# Altium PCB EB2_Cyclone_1_03.PcbDoc (part 1 of 4)
Units mm, origin at the board's own origin, x right, y up, seen from the top; angles counter-clockwise.
Board outline 165.1 x 115.01 mm, 6 copper layers (Top Layer, MidLayer1, VCC Plane, GND Plane, MidLayer2, Bottom Layer); 336 components, 379 nets, 1581 pads, 731 vias.
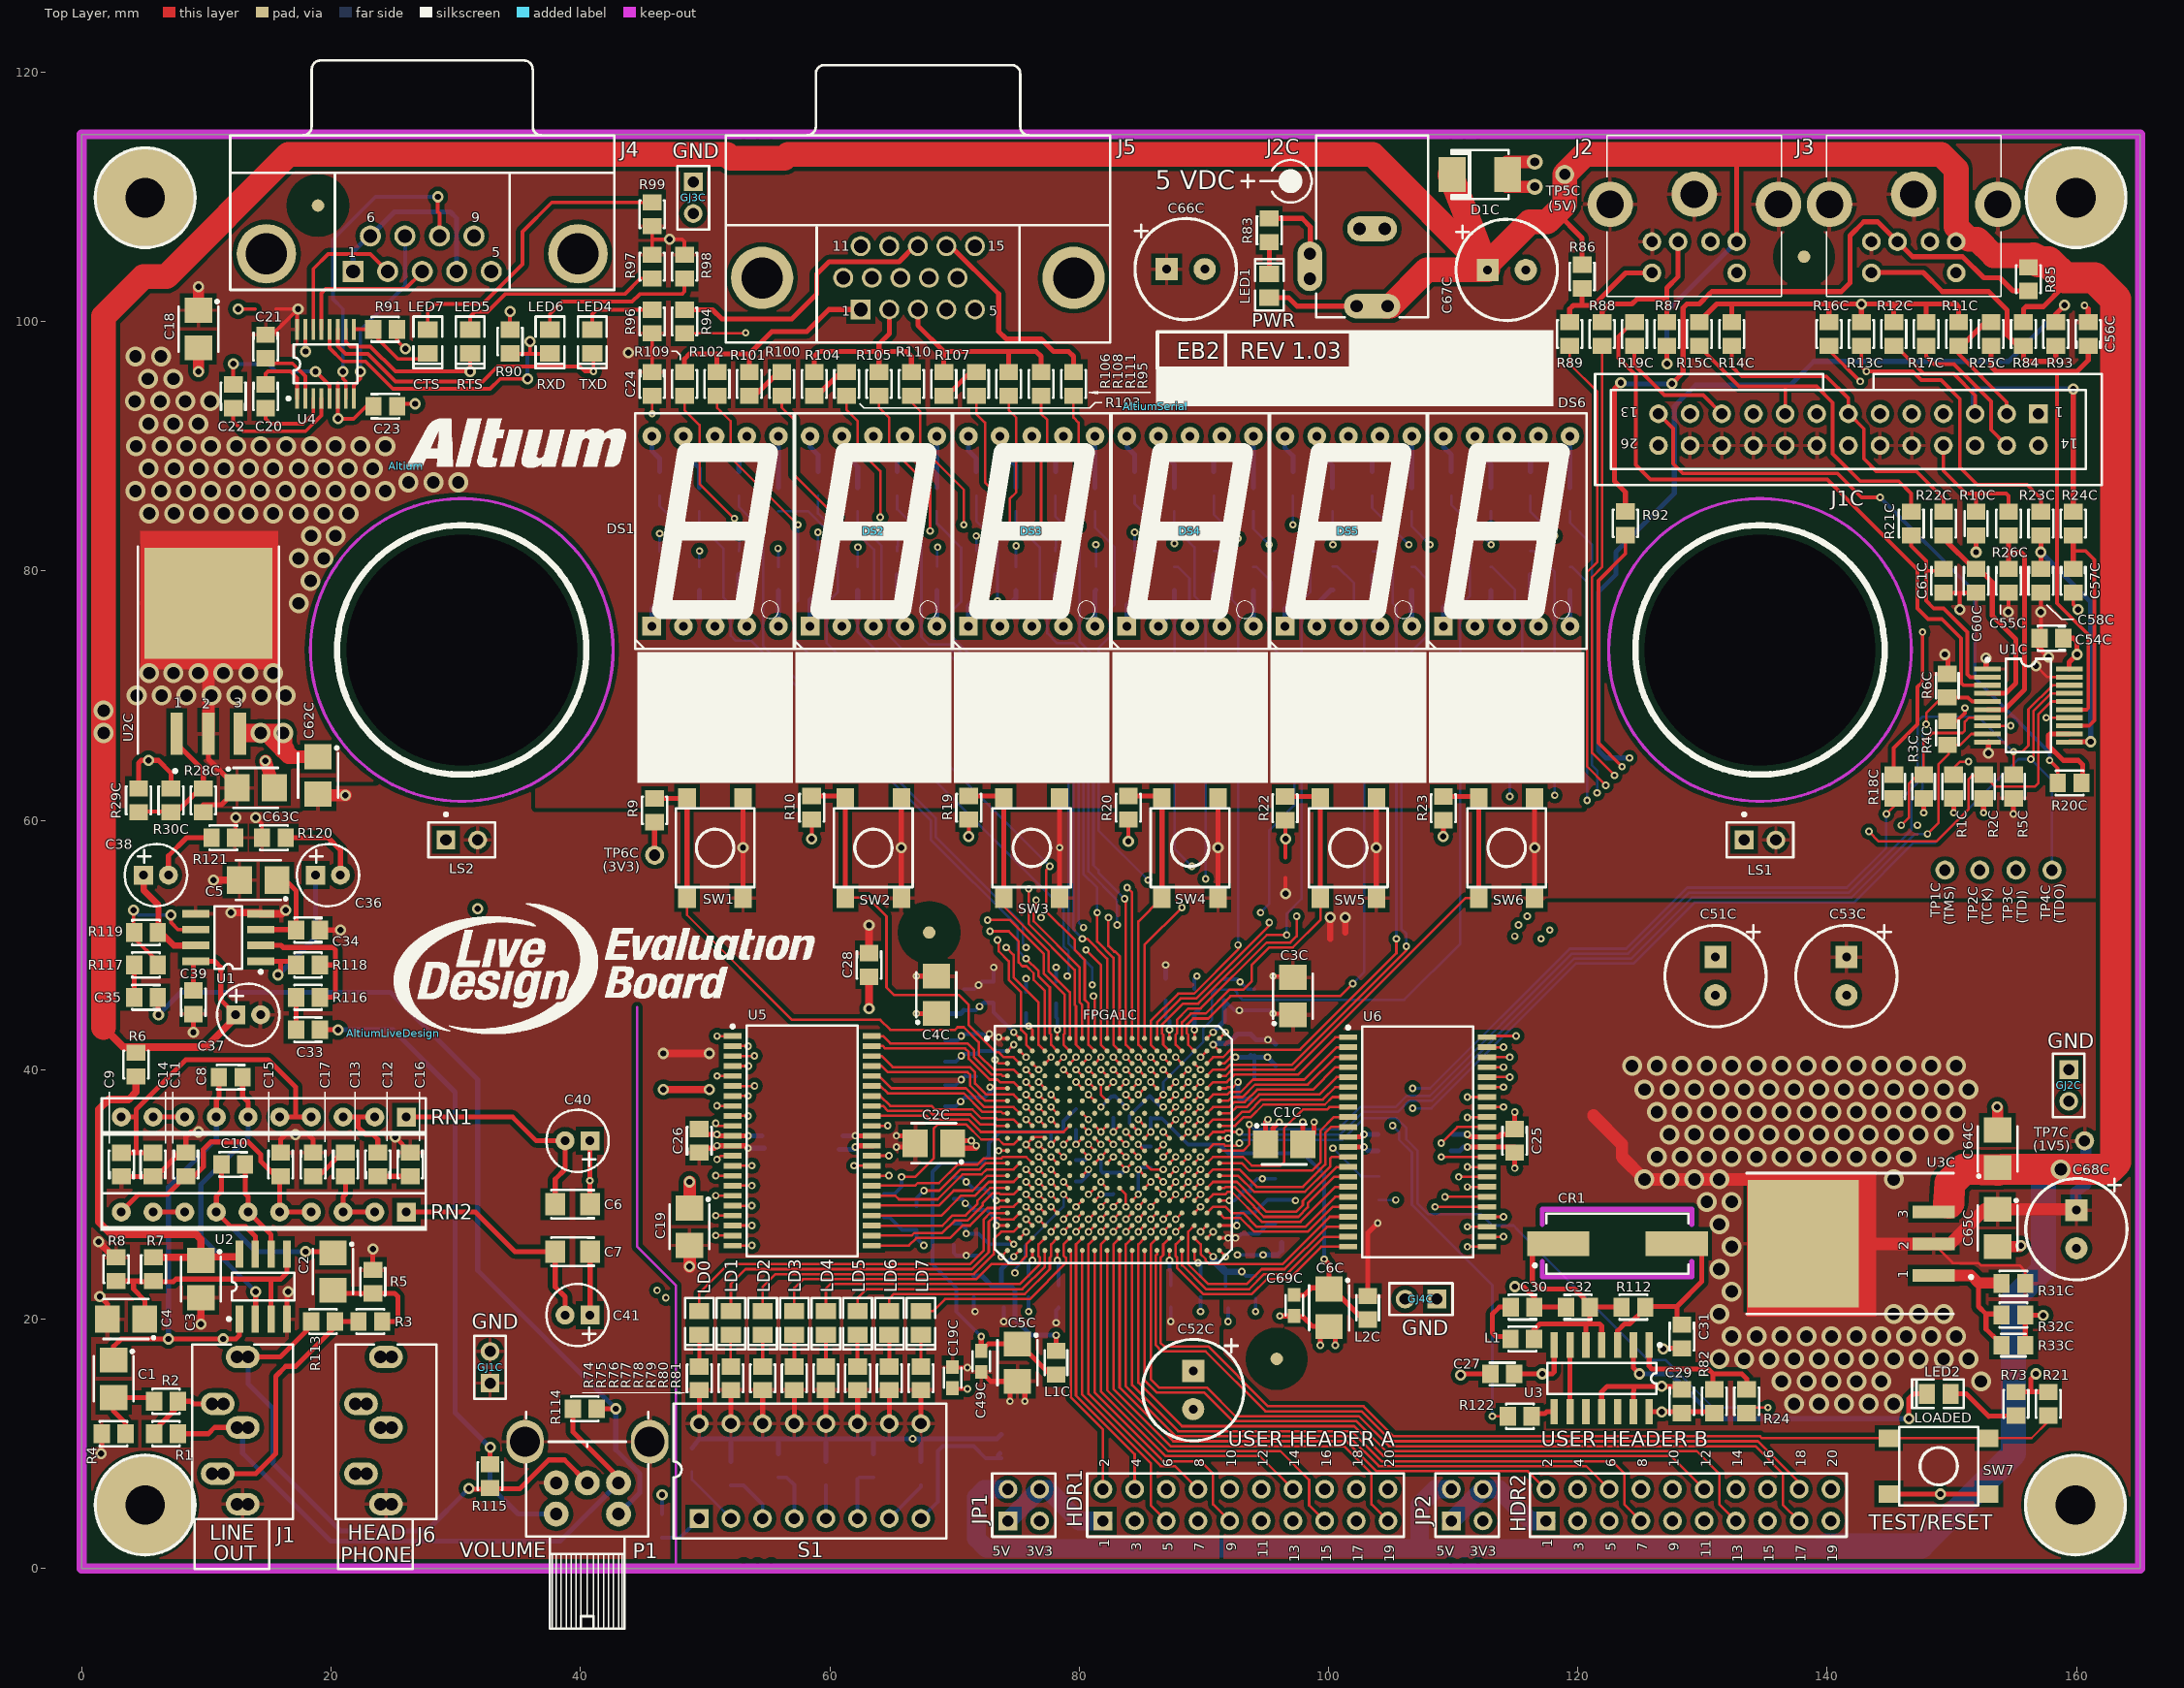
[diagram p0: Top Layer view]
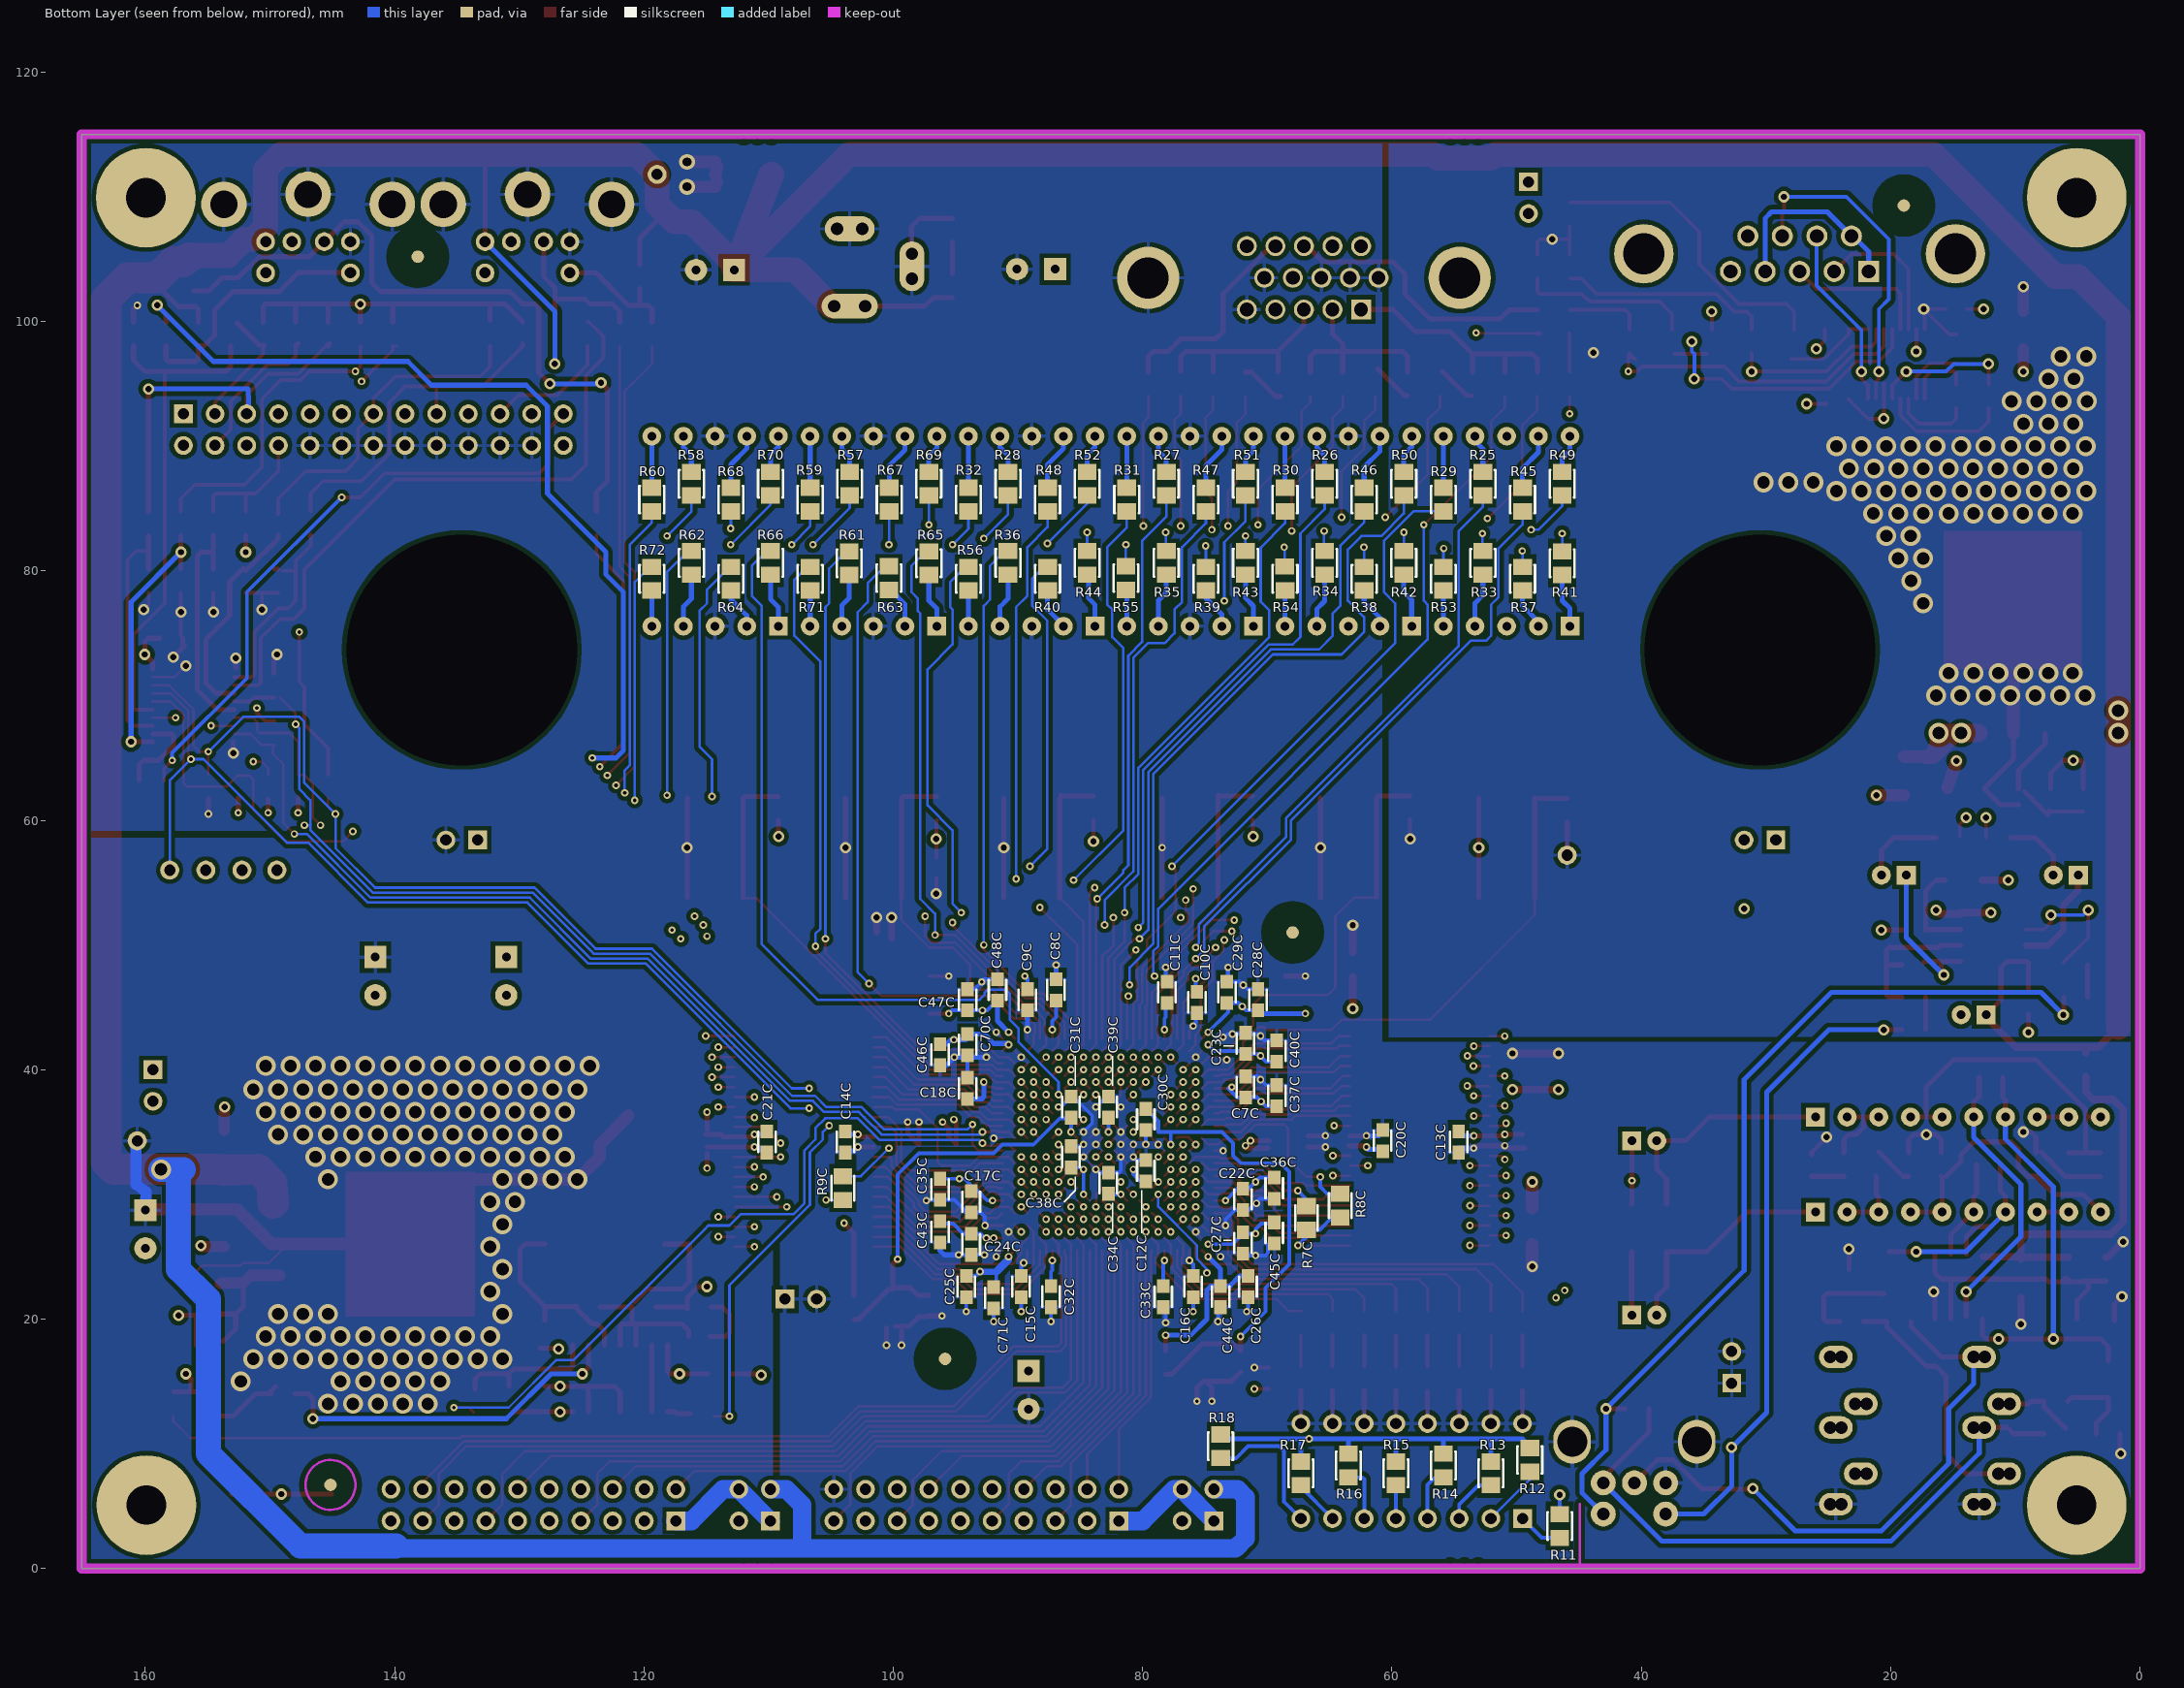
[diagram p1: Bottom Layer view, seen from below]
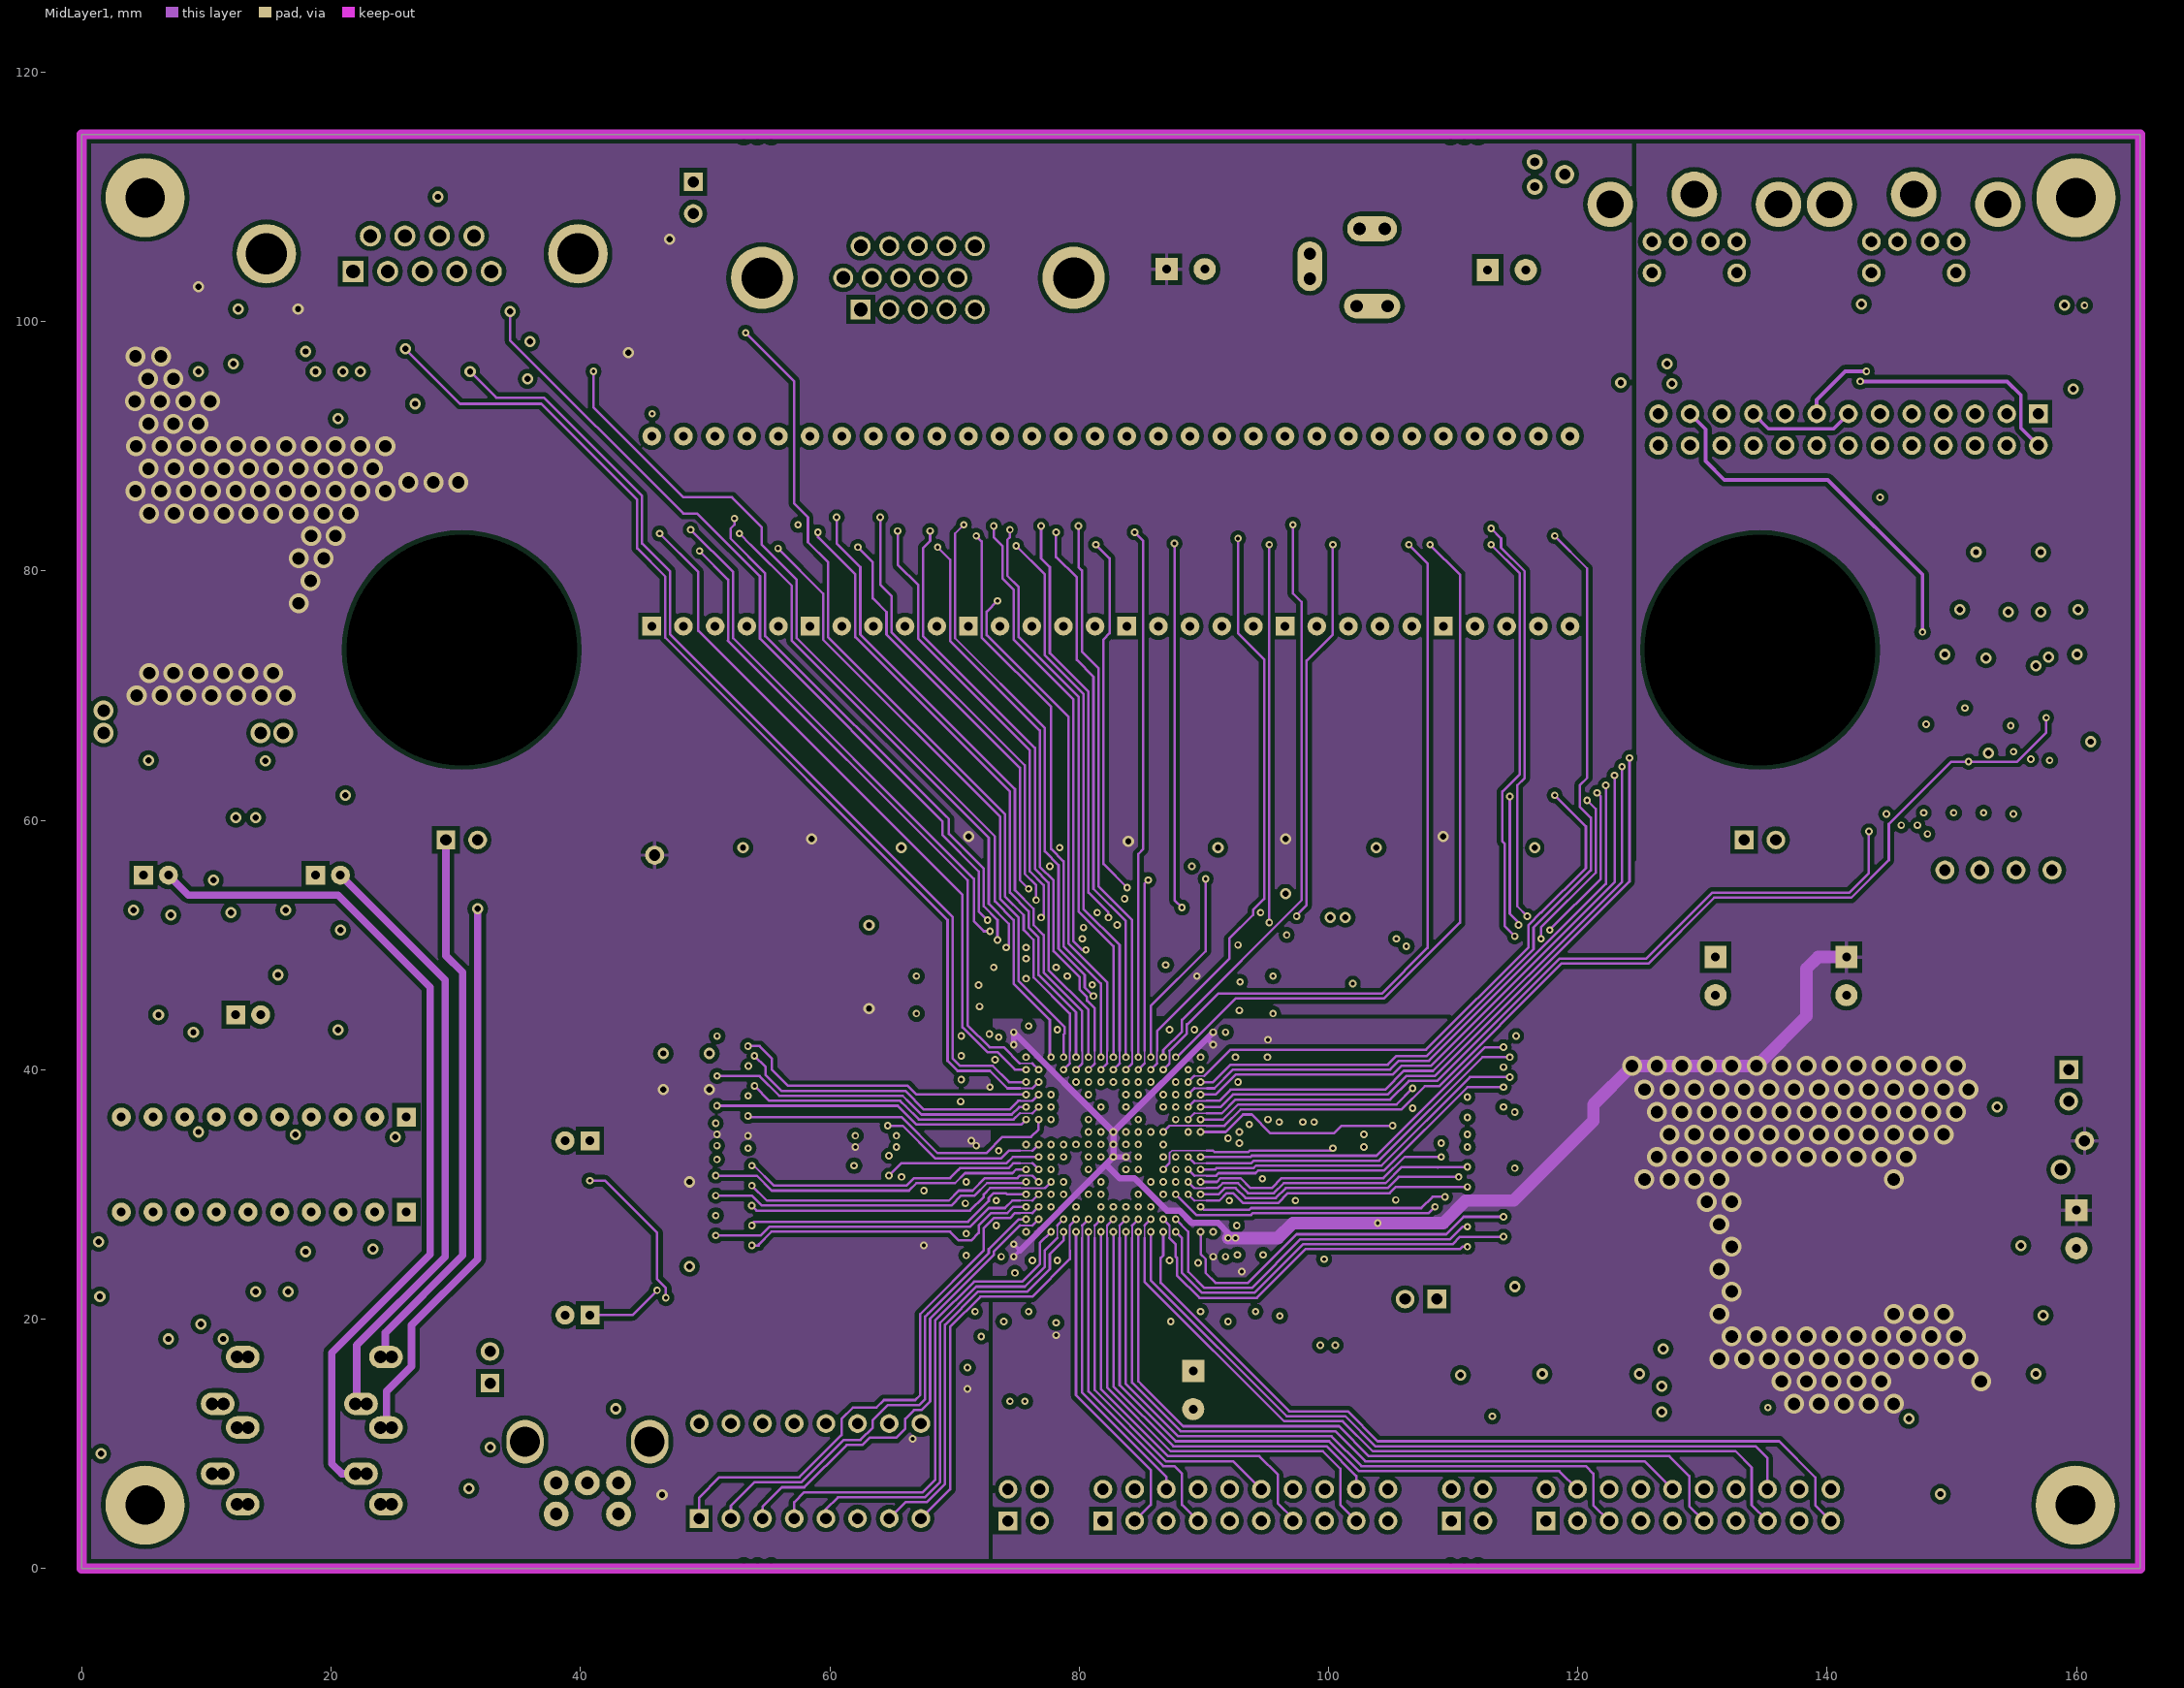
[diagram p2: MidLayer1]
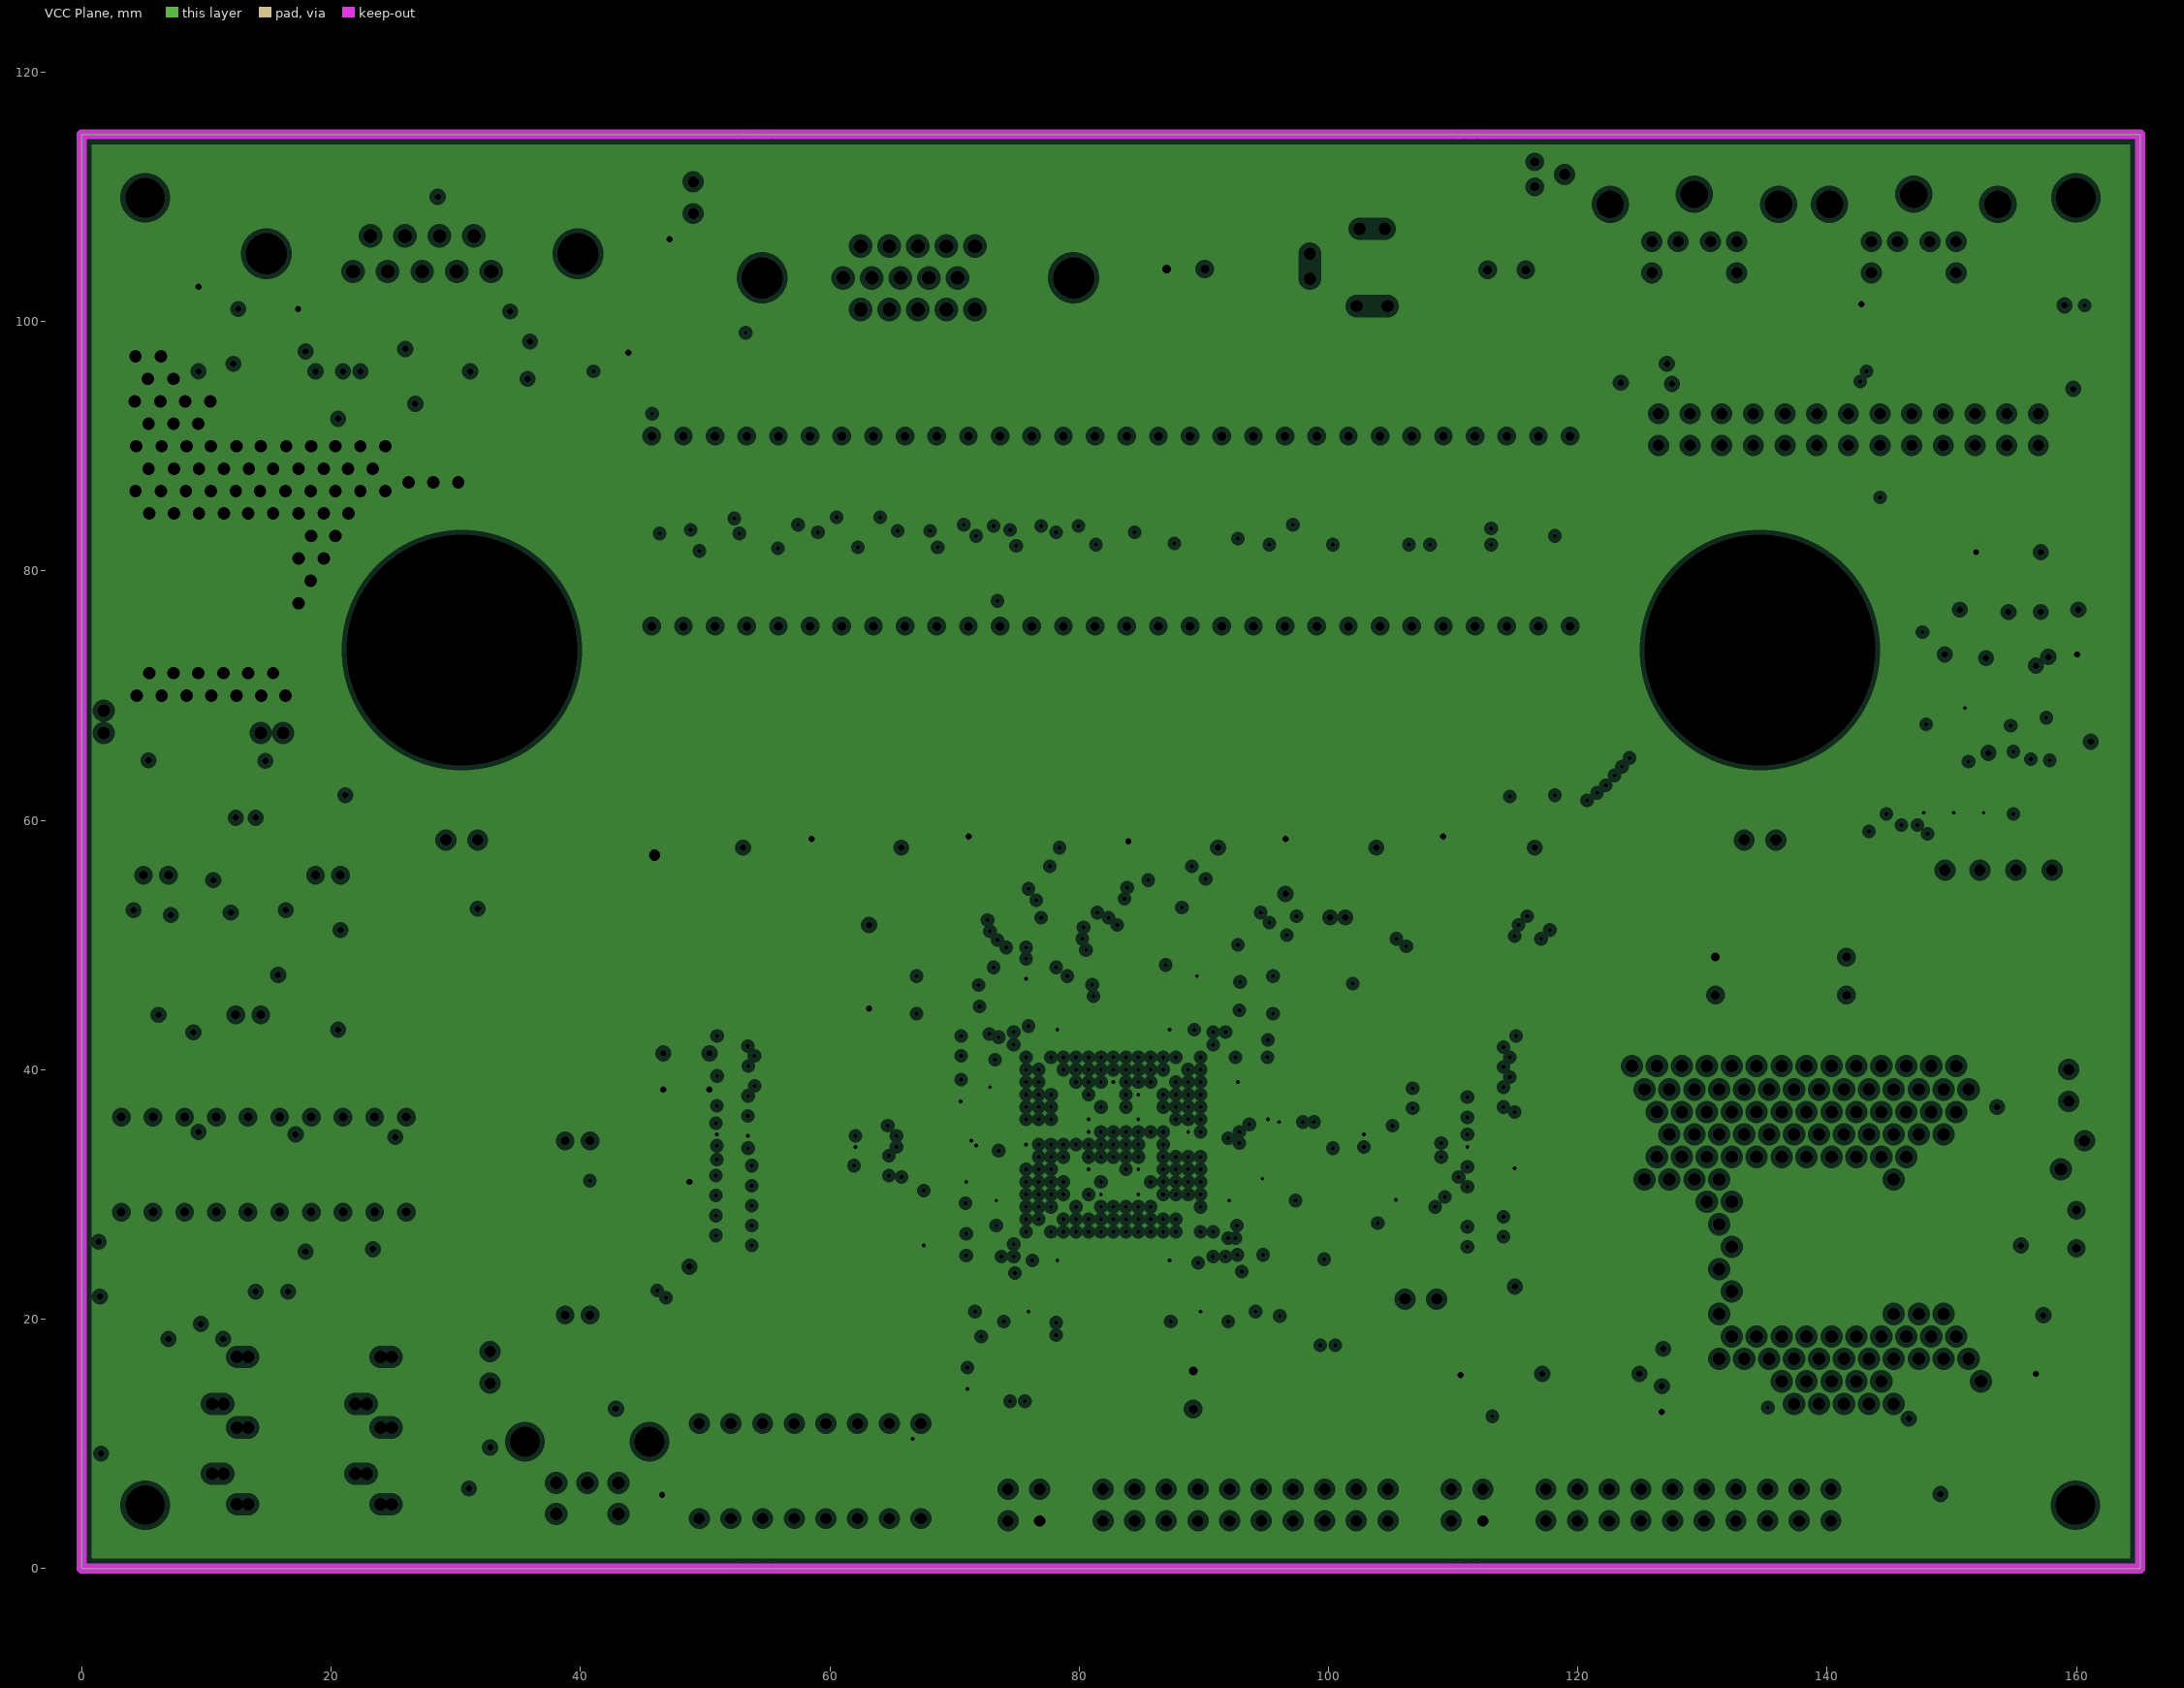
[diagram p3: VCC Plane, clearances drawn from the general rule]
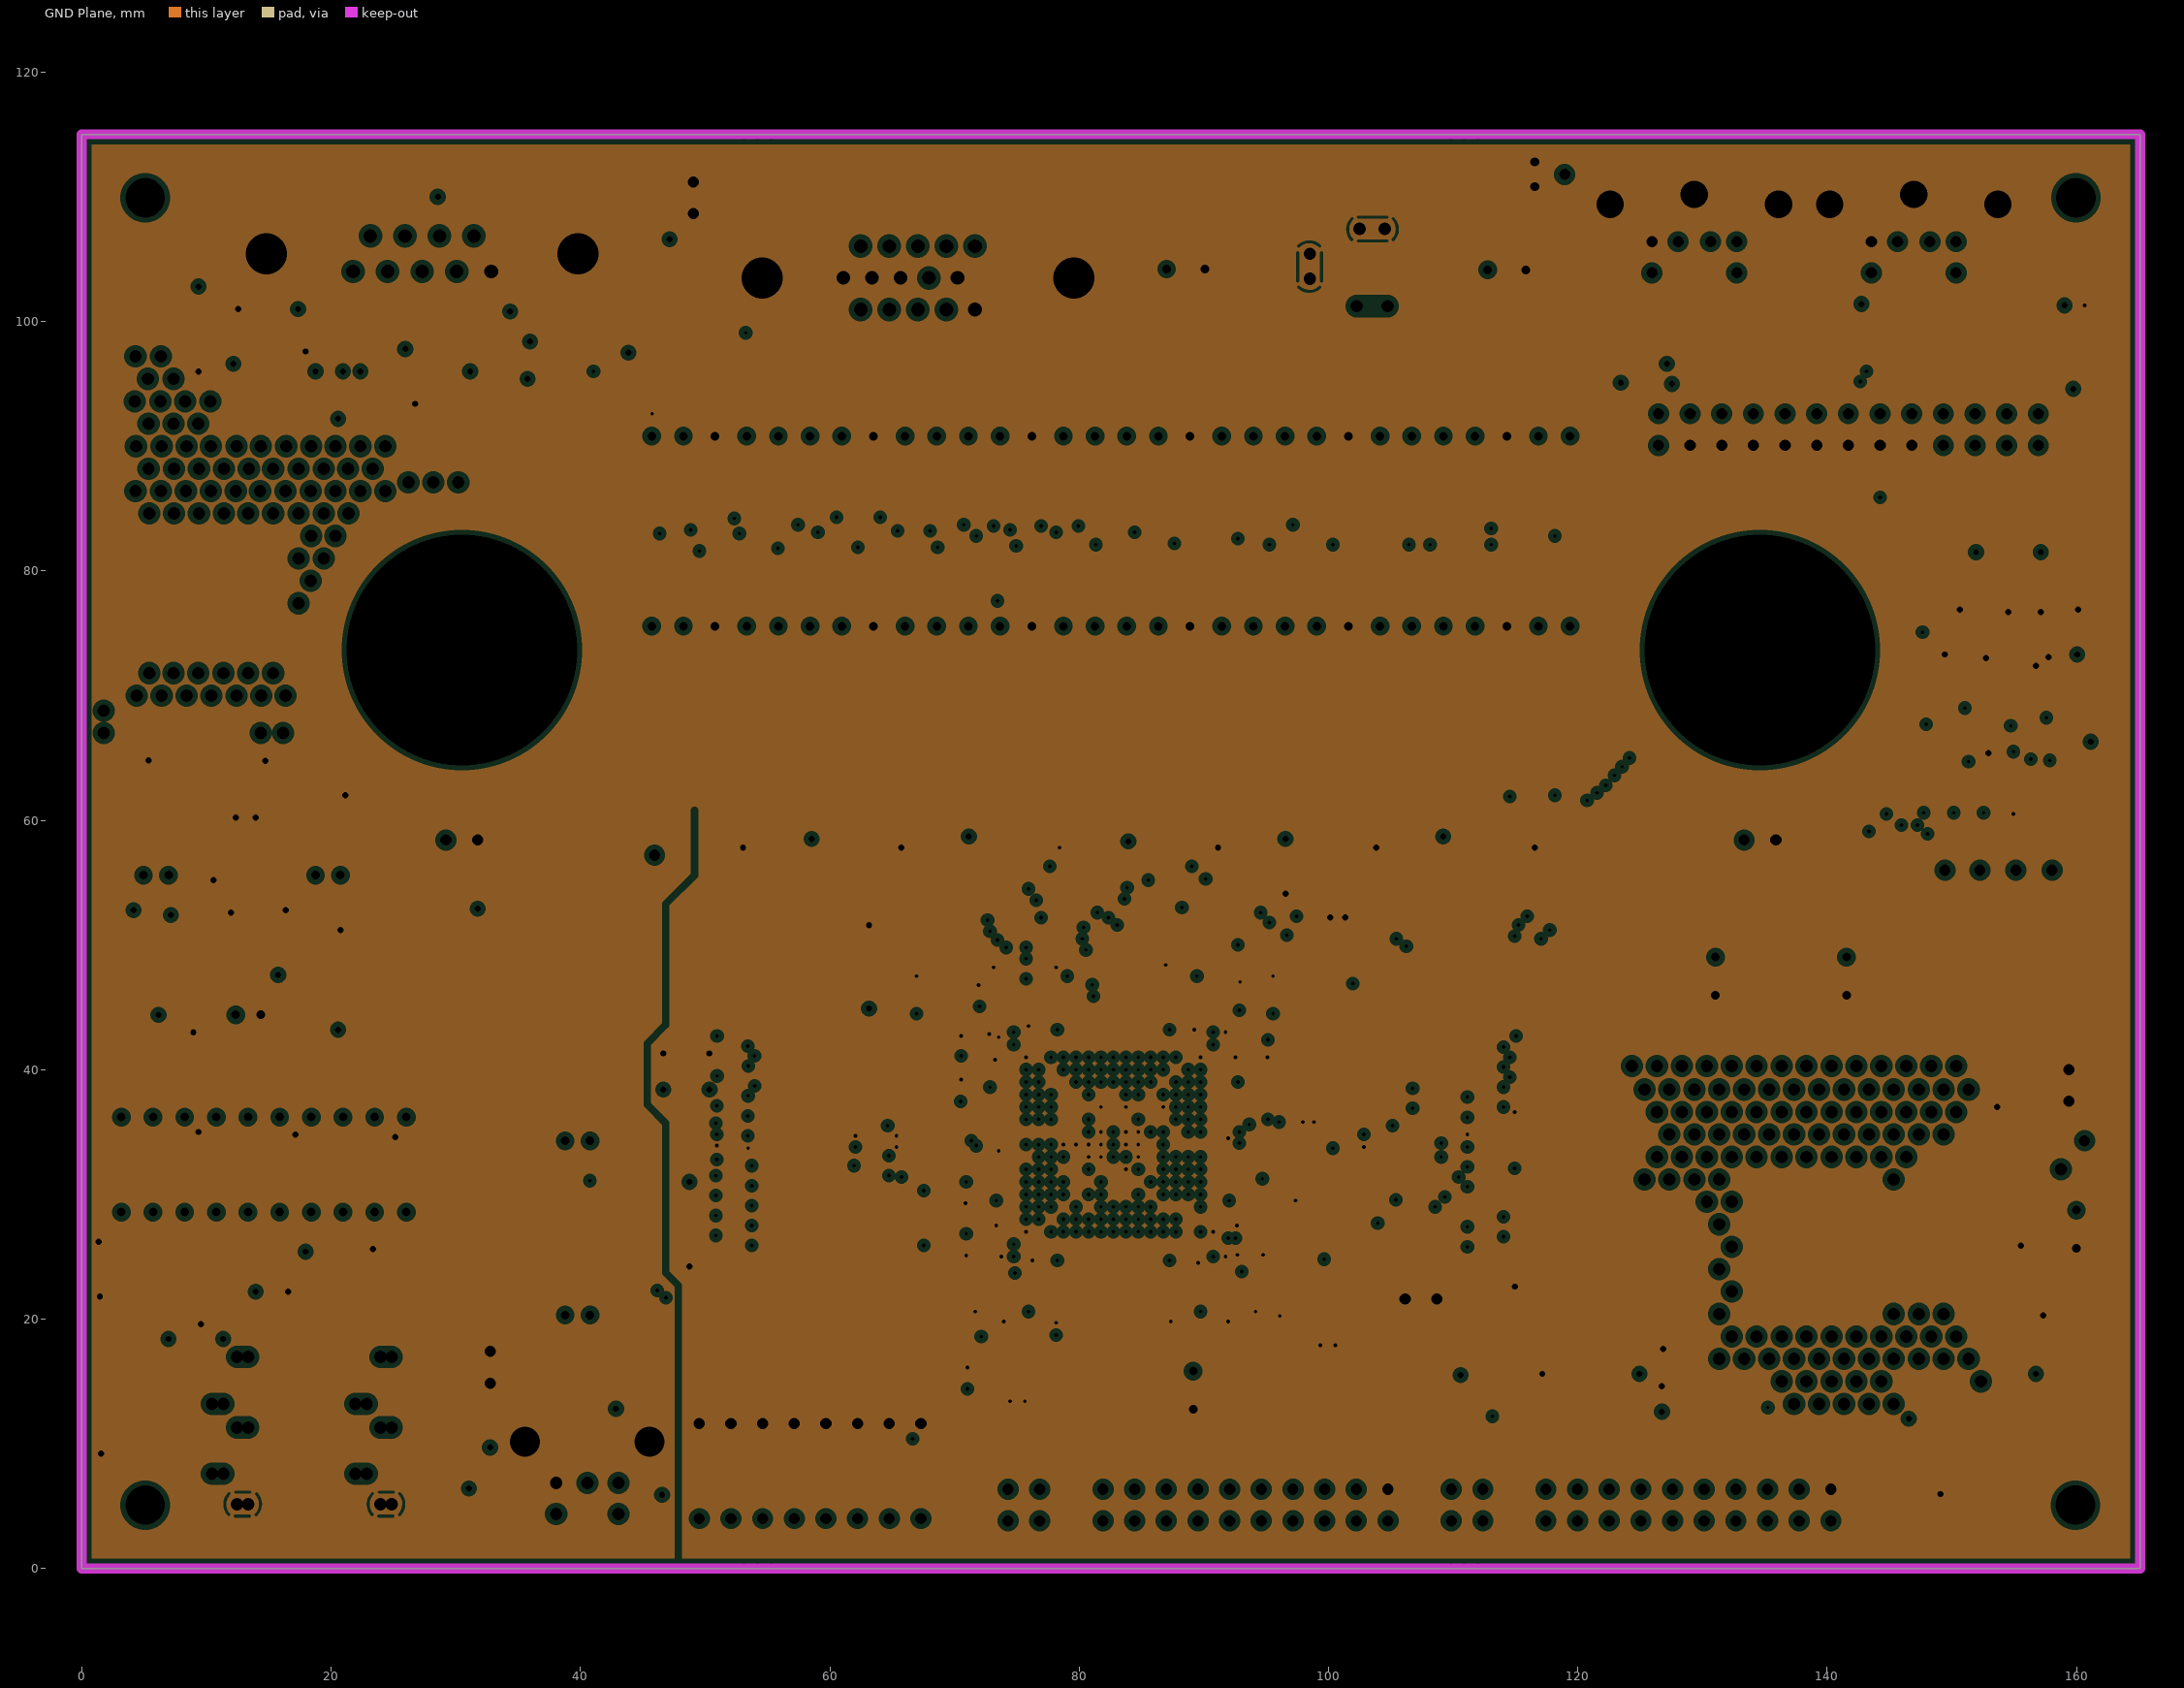
[diagram p4: GND Plane, clearances drawn from the general rule]
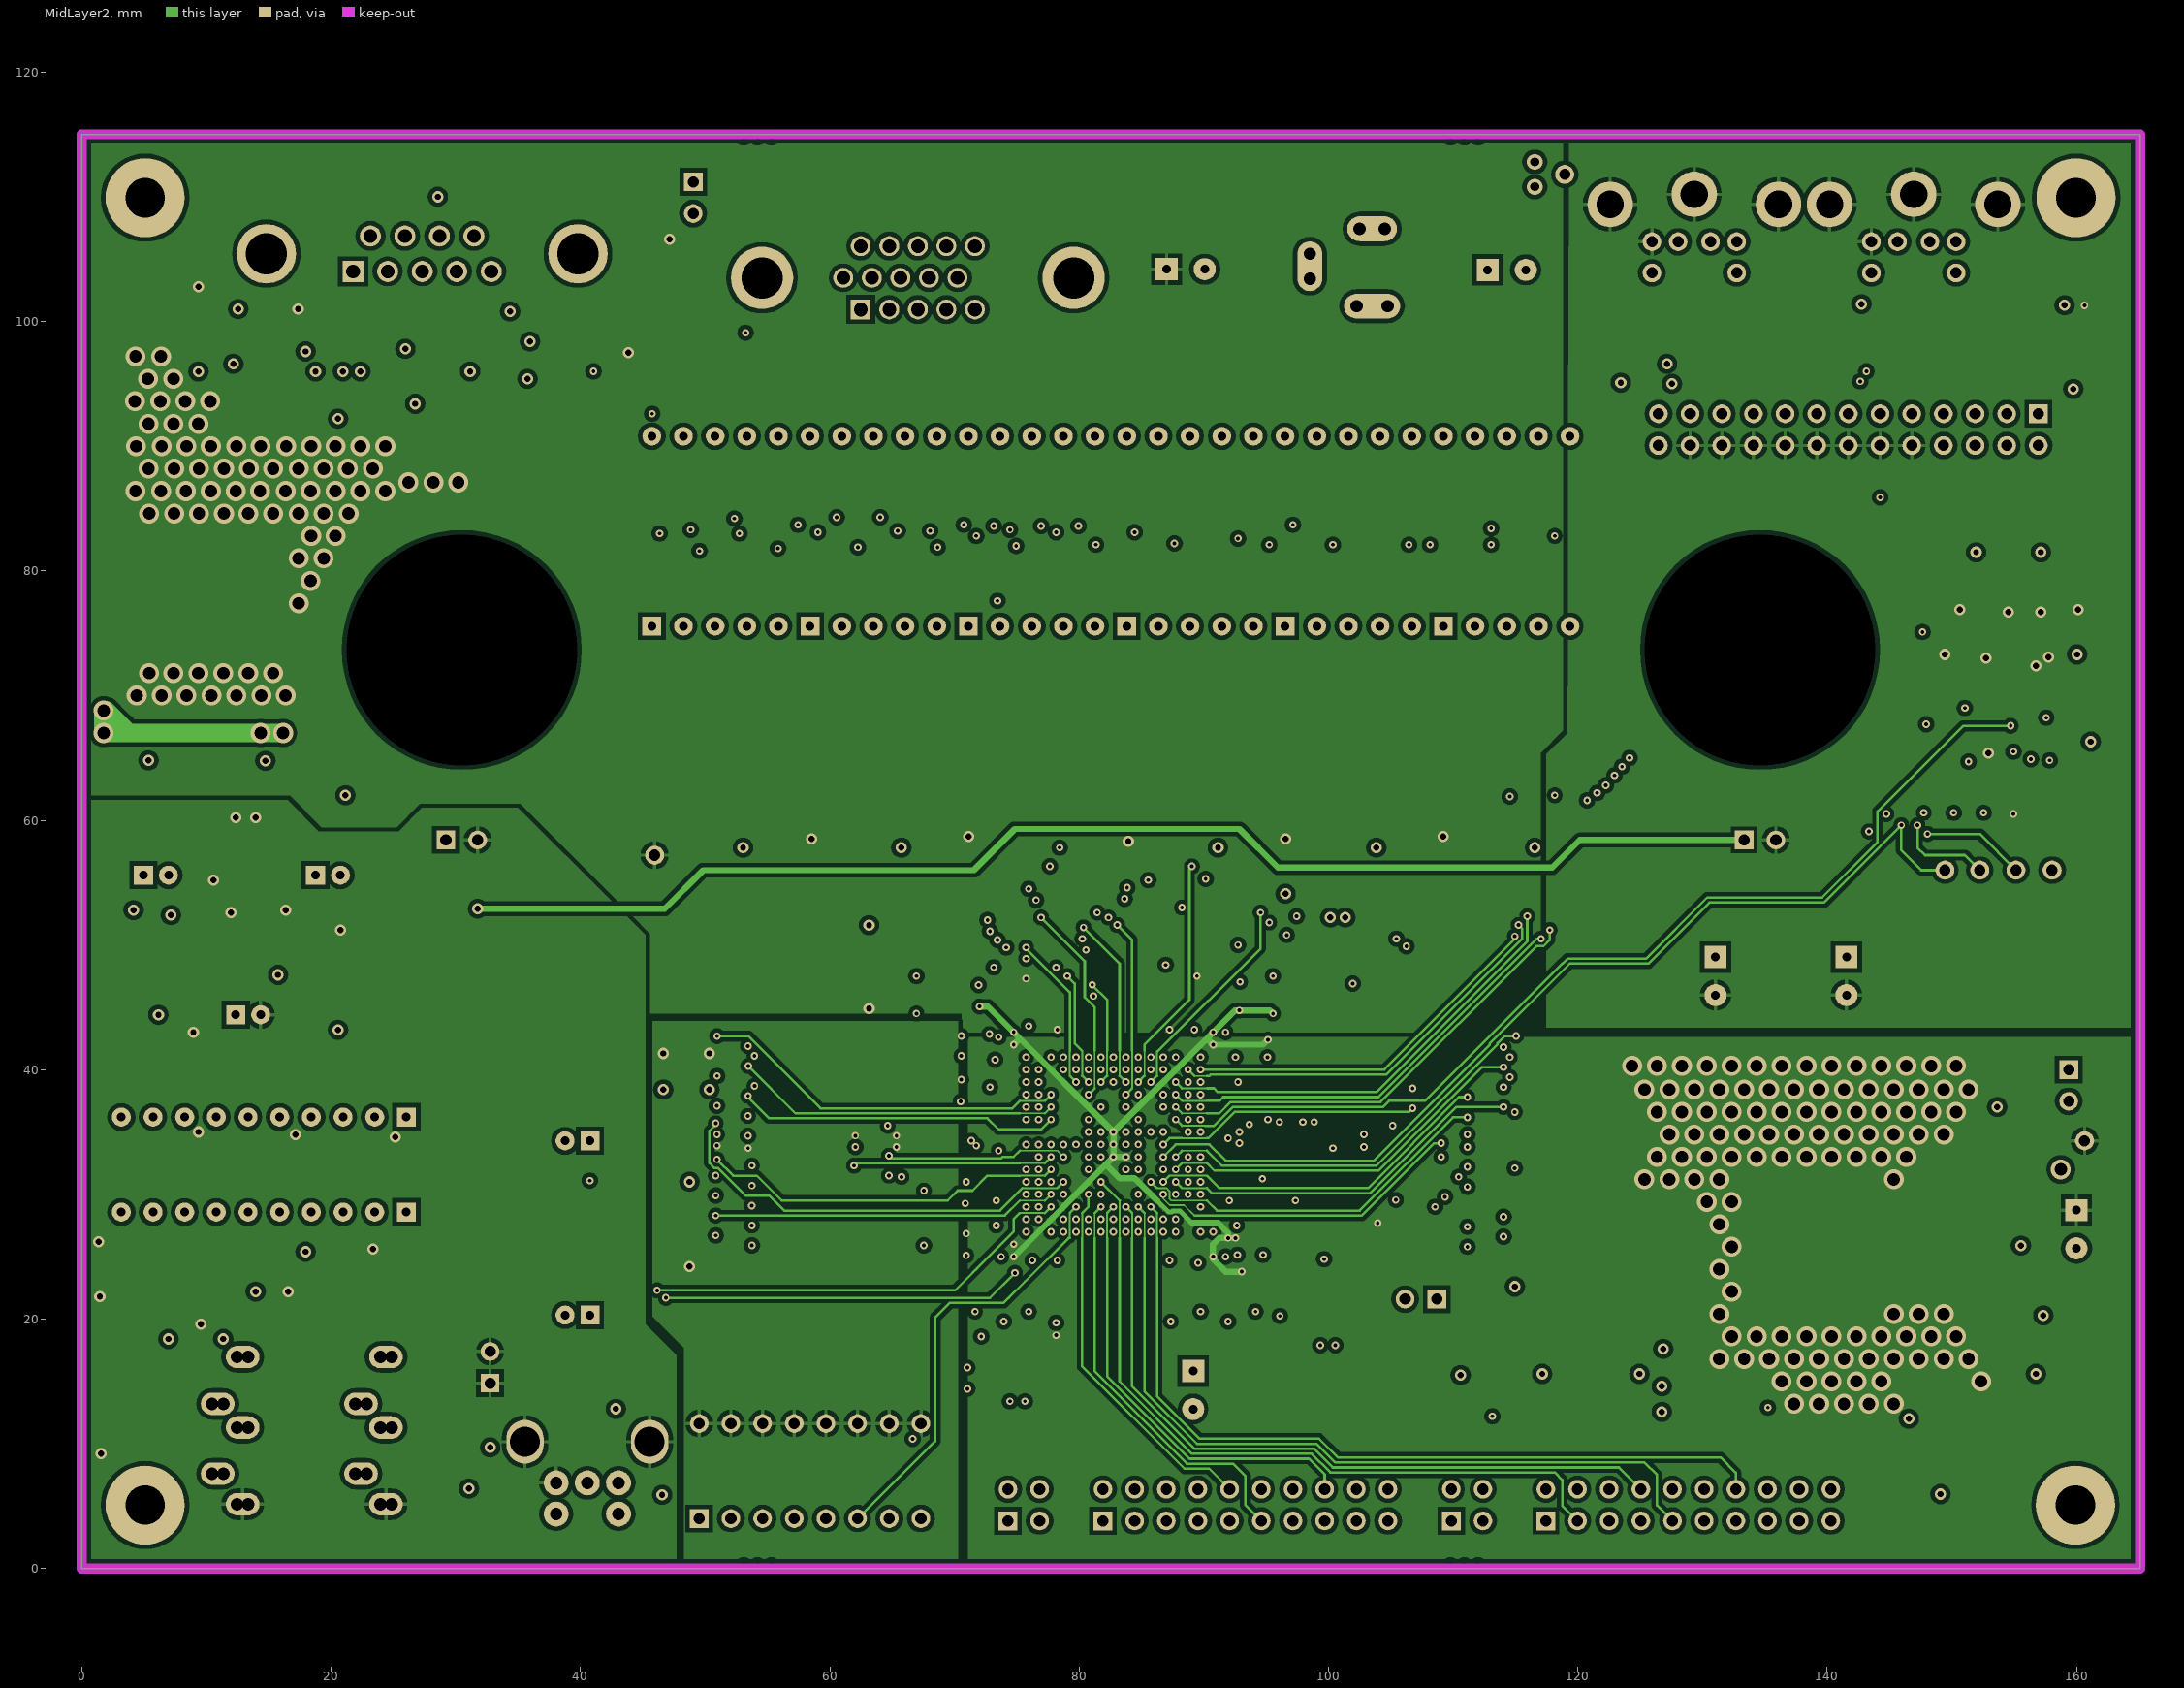
[diagram p5: MidLayer2]

## Layer stack, top to bottom
Top Layer: signal copper 0.0356
Dielectric: core 0.32, FR-4, Dk 4.8
MidLayer1: signal copper 0.0356
Dielectric: prepreg 0.32, FR-4, Dk 4.8
VCC Plane: plane copper 0.0356, net VCC
Dielectric: core 0.32, FR-4, Dk 4.8
GND Plane: plane copper 0.0356, net GND
Dielectric: prepreg 0.32, FR-4, Dk 4.8
MidLayer2: signal copper 0.0356
Dielectric: core 0.32, FR-4, Dk 4.8
Bottom Layer: signal copper 0.0356

## Board outline
0,0 165.1,0 165.1,115.011 0,115.011

## Design rules (kind name [scope] priority, off if disabled: settings)
Clearance Clearance_Breakout_Pads [InPolygon vs IsPad && Name = 'Free-MB'] p1: gap=0.5
Clearance "Fiducial Pad Clearance" [InPadClass('Fiducial Pads')] p2: gap=2
Clearance "Speaker Pad Clearance" [InPadClass('Speaker Cutouts')] p3: gap=3
Clearance Clearance_Polygons [InPolygon] p4: gap=0.35
Clearance "InnerLayer Track-Via Clearance" [OnMid And IsTrack vs IsVia] p5: gap=0.127
Clearance Clearance_SSO-G20/P.65 [HasFootprint('SSO-G20/P.65') vs HasFootprint('SSO-G20/P.65')] p6: gap=0.229
Clearance "Via-Via Clearance" [IsVia vs IsVia] p7: gap=0.3
Clearance "Pad-Pad Clearance Same Net" [IsPad And Not (HasFootprint('ST-3150-5N') Or HasFootPrint('KLD-0202')) vs IsPad] p8: gap=0.254
Clearance "Via-Pad Clearance" [IsVia vs IsPad] p9: gap=0.2
Clearance "General Clearance" [All] p10: gap=0.2
ComponentClearance "7 Segment Display Clearance" [HasFootprint('SA/SC56') vs HasFootprint('SA/SC56')] p1: gap=0 collisioncheckmode=3 verticalgap=0.254 showdistances=FALSE
ComponentClearance "SMD LED Clearance" [HasFootprint('SMD _LED') vs HasFootprint('SMD _LED')] p2: gap=0 collisioncheckmode=3 verticalgap=0.254 showdistances=FALSE
ComponentClearance "General ComponentClearance" [All] p3: gap=0.3 collisioncheckmode=3 verticalgap=0.254 showdistances=FALSE
FabricationTestPointUsage TestPointUsage [All] p1 off: valid=0 allowmultiple=FALSE
FabricationTestpoint Testpoint [All] p1 off: side=3 testpointundercomponent=TRUE minsize=1.016 maxsize=2.54 preferedsize=1.524 minholesize=0 maxholesize=1.016 preferedholesize=0.813 testpointgrid=0.025 allowsidetop=TRUE allowsidebottom=TRUE usegrid=TRUE gridtolerance=0
HoleSize HoleSize_Speaker_Cutouts [(InPadClass('Speaker Cutouts'))] p1: absolutevalues=TRUE maxlimit=18.5 minlimit=0 maxpercent=80.000 minpercent=20.000
HoleSize "HoleSize_AUdio Jack" [HasFootPrint('ST-3150-5N')] p2: absolutevalues=TRUE maxlimit=2.54 minlimit=0 maxpercent=80.000 minpercent=20.000
HoleSize "HoleSize_Power Connector" [HasFootprint('KLD-0202')] p3: absolutevalues=TRUE maxlimit=2.54 minlimit=0 maxpercent=80.000 minpercent=20.000
HoleSize [All] p4: absolutevalues=TRUE maxlimit=5.2 minlimit=0.25 maxpercent=80.000 minpercent=20.000
PlaneClearance "Speaker Pad Plane Pullback" [InPadClass('Speaker Cutouts')] p1: clearance=3
PlaneClearance [All] p2: clearance=0.4
PlaneConnect PlaneConnect_Vias [isvia] p1: planeconnectstyle=Direct reliefexpansion=0.508 reliefentries=4 reliefconductorwidth=0.254 reliefairgap=0.254
PlaneConnect PlaneConnect_Obround_Pads [InPadClass('Obround Hole Pads')] p2: planeconnectstyle=Direct reliefexpansion=0.508 reliefentries=4 reliefconductorwidth=0.254 reliefairgap=0.254
PlaneConnect [All] p3: planeconnectstyle=Relief reliefexpansion=0.5 reliefentries=4 reliefconductorwidth=0.25 reliefairgap=0.25
PolygonConnect [All] p1: connectstyle=Relief reliefconductorwidth=0.3 reliefentries=4 polygonreliefangle="90 Angle"
RoutingVias [All] p1: holewidth=0.3 width=0.6 viastyle="Through Hole" minholewidth=0.3 minwidth=0.6 maxholewidth=1 maxwidth=1.6
SilkscreenOverComponentPads [All] p1: minsilkscreentomaskgap=0.254
SolderMaskExpansion SolderMaskExpansion_Vias [IsVia] p1: expansion=-0.65
SolderMaskExpansion [All] p2: expansion=0.1
Width [All] p1: maxlimit=2.5 minlimit=0.127 preferedwidth=1 toplayer_minwidth=0.2 toplayer_prefwidth=0.2 midlayer1_prefwidth=0.2 bottomlayer_prefwidth=0.3 minimp=50.000000 maximp=50.000000 favimp=50.000000
21 further rules are at their usual default settings.

## Classes and differential pairs
pad class "Obround Hole Pads": J1-1 J1-1A J1-1B J1-2 J1-2A J1-2B J1-3 J1-3A J1-3B J1-4 J1-4A J1-4B J1-5 J1-5A J1-5B J2C-1 J2C-1A J2C-1B J2C-2 J2C-2A J2C-2B J2C-3 J2C-3A J2C-3B J6-1 J6-1A J6-1B J6-2 J6-2A J6-2B J6-3 J6-3A J6-3B J6-4 J6-4A J6-4B J6-5 J6-5A J6-5B
pad class "Fiducial Pads": Free-FID0 Free-FID1 Free-FID2 Free-FID3 Free-FID4 Free-FID5 Free-FID6 Free-FID7 Free-FID8
net class LED[7..0]: LED0 LED1 LED2 LED3 LED4 LED5 LED6 LED7
net class DIG5_SEG[7..0]: DIG5_SEG0 DIG5_SEG1 DIG5_SEG2 DIG5_SEG3 DIG5_SEG4 DIG5_SEG5 DIG5_SEG6 DIG5_SEG7
net class DIG4_SEG[7..0]: DIG4_SEG0 DIG4_SEG1 DIG4_SEG2 DIG4_SEG3 DIG4_SEG4 DIG4_SEG5 DIG4_SEG6 DIG4_SEG7
net class SW_USER[5..0]: SW_USER0 SW_USER1 SW_USER2 SW_USER3 SW_USER4 SW_USER5
net class SW_DIP[7..0]: SW_DIP0 SW_DIP1 SW_DIP2 SW_DIP3 SW_DIP4 SW_DIP5 SW_DIP6 SW_DIP7
net class SRAM1_D[15..0]: SRAM1_D0 SRAM1_D1 SRAM1_D2 SRAM1_D3 SRAM1_D4 SRAM1_D5 SRAM1_D6 SRAM1_D7 SRAM1_D8 SRAM1_D9 SRAM1_D10 SRAM1_D11 SRAM1_D12 SRAM1_D13 SRAM1_D14 SRAM1_D15
net class SRAM1_A[18..0]: SRAM1_A0 SRAM1_A1 SRAM1_A2 SRAM1_A3 SRAM1_A4 SRAM1_A5 SRAM1_A6 SRAM1_A7 SRAM1_A8 SRAM1_A9 SRAM1_A10 SRAM1_A11 SRAM1_A12 SRAM1_A13 SRAM1_A14 SRAM1_A15 SRAM1_A16 SRAM1_A17 SRAM1_A18
net class SRAM0_D[15..0]: SRAM0_D0 SRAM0_D1 SRAM0_D2 SRAM0_D3 SRAM0_D4 SRAM0_D5 SRAM0_D6 SRAM0_D7 SRAM0_D8 SRAM0_D9 SRAM0_D10 SRAM0_D11 SRAM0_D12 SRAM0_D13 SRAM0_D14 SRAM0_D15
net class SRAM0_A[18..0]: SRAM0_A0 SRAM0_A1 SRAM0_A2 SRAM0_A3 SRAM0_A4 SRAM0_A5 SRAM0_A6 SRAM0_A7 SRAM0_A8 SRAM0_A9 SRAM0_A10 SRAM0_A11 SRAM0_A12 SRAM0_A13 SRAM0_A14 SRAM0_A15 SRAM0_A16 SRAM0_A17 SRAM0_A18
net class RED[2..0]: RED0 RED1 RED2
net class IO[35..0]: IO0 IO1 IO2 IO3 IO4 IO5 IO6 IO7 IO8 IO9 IO10 IO11 IO12 IO13 IO14 IO15 IO16 IO17 IO18 IO19 IO20 IO21 IO22 IO23 IO24 IO25 IO26 IO27 IO28 IO29 IO30 IO31 IO32 IO33 IO34 IO35
net class GREEN[2..0]: GREEN0 GREEN1 GREEN2
net class DIG3_SEG[7..0]: DIG3_SEG0 DIG3_SEG1 DIG3_SEG2 DIG3_SEG3 DIG3_SEG4 DIG3_SEG5 DIG3_SEG6 DIG3_SEG7
net class DIG2_SEG[7..0]: DIG2_SEG0 DIG2_SEG1 DIG2_SEG2 DIG2_SEG3 DIG2_SEG4 DIG2_SEG5 DIG2_SEG6 DIG2_SEG7
net class DIG1_SEG[7..0]: DIG1_SEG0 DIG1_SEG1 DIG1_SEG2 DIG1_SEG3 DIG1_SEG4 DIG1_SEG5 DIG1_SEG6 DIG1_SEG7
net class DIG0_SEG[7..0]: DIG0_SEG0 DIG0_SEG1 DIG0_SEG2 DIG0_SEG3 DIG0_SEG4 DIG0_SEG5 DIG0_SEG6 DIG0_SEG7
net class BLUE[2..0]: BLUE0 BLUE1 BLUE2
component class U_NEB_SRAM: C25 C26 C27 C28 U5 U6
component class U_NEB_USRIO: HDR1 HDR2 JP1 JP2
component class U_NEB_PSU: C62C C63C C64C C65C C66C C67C C68C C71S C76S D1C GJ1C GJ2C GJ3C GJ4C J2C R28C R29C R30C R31C R32C R33C R33S R34S TP5C TP6C TP7C U2C U3C U3S
component class U_NEB_PCIO: C18 C19 C20 C21 C22 C23 C24 J2 J3 J4 J5 LED4 LED5 LED6 LED7 R84 R85 R86 R87 R88 R89 R90 R91 R92 R93 R94 R95 R96 R97 R98 R99 R100 R101 R102 R103 R104 R105 R106 R107 R108 R109 R110 R111 U4
component class U_NEB_LED_KEY: DS1 DS2 DS3 DS4 DS5 DS6 L0 L2 L3 L4 L5 L6 L7 LD0 LD1 LD2 LD3 LD4 LD5 LD6 LD7 LED1 LED2 R9 R10 R11 R12 R13 R14 R15 R16 R17 R18 R19 R20 R21 R22 R23 R24 R25 R26 R27 R28 R29 R30 R31 R32 R33 R34 R35 R36 R37 R38 R39 R40 R41 R42 R43 R44 R45 R46 R47 R48 R49 R50 R51 R52 R53 R54 R55 R56 R57 R58 R59 R60 R61 R62 R63 R64 R65 R66 R67 R68 R69 R70 R71 R72 R73 R74 R75 R76 R77 R78 R79 R80 R81 R82 R83 S1 SW1 SW2 SW3 SW4 SW5 SW6 SW7 U3
component class U_NEB_JTAG_INT: C54C C55C C56C C57C C58C C59C C60C C61C J1C R10C R11C R12C R13C R14C R15C R16C R17C R18C R19C R20C R21C R22C R23C R24C R25C R26C R27C U1C
component class U_NEB_AUDIO_OUT: C1 C2 C3 C4 C5 C6 C7 C8 C9 C10 C11 C12 C13 C14 C15 C16 C17 C33 C34 C35 C36 C37 C38 C39 C40 C41 J1 J6 LS1 LS2 LS3 LS4 P1 R1 R2 R3 R4 R5 R6 R7 R8 R113 R114 R115 R116 R117 R118 R119 R120 R121 RN1 RN2 SPKR1 U1 U2
component class U_FPGA: C1C C1S C2C C2S C3C C4C C5C C5S C6C C7C C7S C8C C8S C9C C9S C10C C11C C11S C12C C12S C13C C14C C14S C15C C15S C16C C17C C18C C19C C19S C20C C21C C22C C23C C23S C24C C24S C25C C26C C27C C27S C28C C28S C29C C29S C30C C30S C31C C31S C32C C32S C33C C33S C34C C34S C35C C35S C36C C36S C37C C37S C38C C38S C39C C39S C40C C40S C41S C42S C43C C43S C44C C44S C45C C45S C46C C46S C47C C47S C48C C48S C49C C49S C50S C51C C52C C52S C53C C57S C59S C60S C69C C70C C71C C80S C? FPGA1C FPGA1S L1C L2C L? R1C R1S R2C R3C R3S R4C R4S R5C R6C R7C R8C R9C R? TP1C TP2C TP3C TP4C
pad class "Speaker Cutouts": Free-H-SPK2 Free-H_SPK1
component class U_NEB_XTALOSC: C29 C30 C31 C32 CR1 L1 R112 R122

## Components (designator, comment, footprint, x,y, rotation, side; value= is the part's Value field where it differs from the comment)
Altium "Comment" Altium 26.035,88.392 r0 top
AltiumLiveDesign "Comment" "Live Design Evaluation Board" 25,42.9 r0 top
AltiumSerial "Comment" "Serial Number - CYCLONE EB2V1.00" 86.15,93.2 r0 top
C1 "10uF" MCCT-B 2.55,15.2 r270 top
C1C "10uF" MCCT-B 96.45,34 r0 top
C2 "10uF" MCCT-B 20.15,23.8 r270 top
C2C "10uF" MCCT-B 68.35,34.1 r180 top
C3 "10uF" MCCT-B 9.55,23.2 r270 top
C3C "10uF" MCCT-B 97.15,45.9 r90 top
C4 "10uF" MCCT-B 3.55,20 r180 top
C4C "10uF" MCCT-B 68.55,46 r90 top
C5 "10uF" MCCT-B 14.15,55.2 r180 top
C5C "10uF" MCCT-B 75.05,16.5 r270 top
C6 "1uF" CC3216-1206 39.37,29.21 r180 top
C6C "10uF" MCCT-B 100.05,20.9 r270 top
C7 "1uF" CC3216-1206 39.37,25.4 r180 top
C7C "10nF" CC1608-0603 71.75,38.6 r90 bottom
C8 "470pF" CC2012-0805#1 11.95,39.4 r180 top
C8C "10nF" CC1608-0603 86.95,46.4 r90 bottom
C9 "470pF" CC2012-0805#1 3.175,32.385 r90 top
C9C "220nF" CC1608-0603 89.25,45.6 r270 bottom
C10 "470pF" CC2012-0805#1 12.15,32.4 r180 top
C10C "220nF" CC1608-0603 75.65,45.4 r270 bottom
C11 "470pF" CC2012-0805#1 8.35,32.4 r270 top
C11C "10nF" CC1608-0603 78.05,46.2 r90 bottom
C12 "6.8nF" CC2012-0805#1 23.75,32.4 r90 top
C12C "220nF" CC1608-0603 79.75,31.9 r90 bottom
C13 "6.8nF" CC2012-0805#1 21.15,32.4 r270 top
C13C "10nF" CC1608-0603 54.65,34.2 r270 bottom
C14 "4.7nF" CC2012-0805#1 5.715,32.385 r90 top
C14C "220nF" CC1608-0603 103.85,34.2 r270 bottom
C15 "4.7nF" CC2012-0805#1 15.95,32.4 r270 top
C15C "220nF" CC1608-0603 89.75,22.6 r90 bottom
C16 "47nF" CC2012-0805#1 26.35,32.4 r270 top
C16C "10nF" CC1608-0603 75.95,22.6 r90 bottom
C17 "47nF" CC2012-0805#1 18.55,32.4 r270 top
C17C "10nF" CC1608-0603 93.75,29.4 r270 bottom
C18 "10uF" MCCT-B 9.35,99.4 r270 top
C18C "220nF" CC1608-0603 94.05,38.5 r90 bottom
C19 "10uF" MCCT-B 48.75,27.4 r270 top
C19C "10nF" CC1608-0603 69.85,15.3 r90 top
C20 "100nF" CC2012-0805#1 14.75,94 r270 top
C20C "220nF" CC1608-0603 60.75,34.3 r90 bottom
C21 "100nF" CC2012-0805#1 14.75,98 r270 top
C21C "10nF" CC1608-0603 110.15,34.2 r90 bottom
C22 "100nF" CC2012-0805#1 12.15,94 r90 top
C22C "10nF" CC1608-0603 71.95,29.6 r270 bottom
C23 "100nF" CC2012-0805#1 24.35,93.2 r0 top
C23C "10nF" CC1608-0603 71.75,42.1 r90 bottom
C24 "100nF" CC2012-0805#1 45.75,95 r270 top
C24C "10nF" CC1608-0603 93.75,26 r270 bottom
C25 "220nF" CC2012-0805#1 114.935,34.29 r270 top
C25C "220nF" CC1608-0603 94.15,22.6 r270 bottom
C26 "220nF" CC2012-0805#1 49.53,34.29 r90 top
C26C "220nF" CC1608-0603 71.55,22.6 r270 bottom
C27 "10nF" CC2012-0805#2 113.95,15.6 r180 top
C27C "10nF" CC1608-0603 71.95,26.1 r270 bottom
C28 "10nF" CC2012-0805#1 63.15,48.4 r270 top
C28C "220nF" CC1608-0603 70.75,45.6 r90 bottom
C29 "10nF" CC2012-0805#1 128.35,13.4 r270 top
C29C "10nF" CC1608-0603 73.25,46.2 r90 bottom
C30 "1nF/NPO" CC2012-0805#1 115.57,20.955 r180 top
C30C "10nF" CC1608-0603 79.75,36 r270 bottom
C31 "15pF/NPO" CC2012-0805#1 128.35,18.6 r270 top
C31C "10nF" CC1608-0603 85.75,37 r90 bottom
C32 "15pF/NPO" CC2012-0805#1 120.015,20.955 r0 top
C32C "10nF" CC1608-0603 87.35,21.8 r270 bottom
C33 "0.1uF" CC2012-0805#1 18.15,43.2 r180 top
C33C "10nF" CC1608-0603 78.35,21.8 r270 bottom
C34 "0.1uF" CC2012-0805#1 18.15,51.2 r180 top
C34C "220nF" CC1608-0603 82.75,30.9 r90 bottom
C35 "0.1uF" CC2012-0805#1 5.15,45.8 r180 top
C35C "220nF" CC1608-0603 96.25,30.4 r270 bottom
C36 "100uF/10V" "CAP D5MM/P2MM" 18.75,55.6 r0 top
C36C "220nF" CC1608-0603 69.45,30.5 r270 bottom
C37 "100uF/10V" "CAP D5MM/P2MM" 12.35,44.4 r0 top
C37C "220nF" CC1608-0603 69.25,37.9 r90 bottom
C38 "100uF/10V" "CAP D5MM/P2MM" 4.95,55.6 r0 top
C38C "220nF" CC1608-0603 85.75,33 r90 bottom
C39 "0.1uF" CC2012-0805#1 8.95,45.4 r90 top
C39C "220nF" CC1608-0603 82.75,37 r90 bottom
C40 "2.2uF/50V/Bip" "CAP D5mm/P2mm" 40.767,34.29 r180 top
C40C "220nF" CC1608-0603 69.25,41.5 r90 bottom
C41 "2.2uF/50V/Bip" "CAP D5mm/P2mm" 40.767,20.32 r180 top
C43C "220nF" CC1608-0603 96.25,27 r270 bottom
C44C "10nF" CC1608-0603 73.75,21.8 r270 bottom
C45C "220nF" CC1608-0603 69.45,26.9 r270 bottom
C46C "220nF" CC1608-0603 96.25,41.2 r270 bottom
C47C "10nF" CC1608-0603 94.05,45.6 r90 bottom
C48C "220nF" CC1608-0603 91.65,46.4 r90 bottom
C49C "220nF" CC1608-0603 72.15,16.6 r270 top
C51C "470uF 16V" RB8/3.5 131.05,47.5 r0 top
C52C "470uF 16V" RB8/3.5 89.15,14.3 r0 top
C53C "470uF 16V" RB8/3.5 141.55,47.5 r0 top
C54C "100nF" CC2012-0805#1 158,74.6 r180 top
C55C "47pF" CC2012-0805#1 154.55,79.2 r270 top
C56C "47pF" CC2012-0805#1 160.95,99 r90 top
C57C "47pF" CC2012-0805#1 159.75,79.2 r270 top
C58C "47pF" CC2012-0805#1 157.15,79.2 r270 top
C60C "47pF" CC2012-0805#1 151.95,79.2 r270 top
C61C "47pF" CC2012-0805#1 149.35,79.2 r270 top
C62C "10uF" MCCT-B 18.95,63.6 r270 top
C63C "10uF" MCCT-B 13.95,62.6 r0 top
C64C "10uF" MCCT-B 153.67,33.655 r90 top
C65C "10uF" MCCT-B 153.67,27.305 r270 top
C66C "470uF 16V" RB8/3.5 88.55,104.2 r90 top
C67C "470uF 16V" RB8/3.5 114.3,104.14 r90 top
C68C "470uF 16V" RB8/3.5 160,27.2 r0 top
C69C "220nF" CC1608-0603 97.25,21.1 r270 top
C70C "10nF" CC1608-0603 94.05,42 r270 bottom
C71C "10nF" CC1608-0603 91.95,21.7 r270 bottom
CR1 "50MHz QC49/SMD" QC49/SMD 123.19,26.035 r0 top
D1C "SMBJ5341B" DO214 112.15,111.8 r180 top
DS1 "HDSP-513A" SA/SC56 45.72,75.565 r0 top locked
DS2 "HDSP-513A" SA/SC56 58.42,75.565 r0 top locked
DS3 "HDSP-513A" SA/SC56 71.12,75.565 r0 top locked
DS4 "HDSP-513A" SA/SC56 83.82,75.565 r0 top locked
DS5 "HDSP-513A" SA/SC56 96.52,75.565 r0 top locked
DS6 "HDSP-513A" SA/SC56 109.22,75.565 r0 top locked
FPGA1C "EP1C12F324C6" FBGA324 82.75,34 r0 top locked
GJ1C "Header 2" HDR1X2 32.75,14.86 r90 top
GJ2C "Header 2" HDR1X2 159.385,40.005 r270 top
GJ3C "Header 2" HDR1X2 49.05,111.2 r270 top
GJ4C "Header 2" HDR1X2 108.69,21.6 r180 top
HDR1 "Header 10X2" HDR2X10 81.915,3.81 r0 top locked
HDR2 "Header 10X2" HDR2X10 117.44,3.81 r0 top locked
J1 "ST-3150-5N" ST-3150-5N 12.05,-0.05 r180 top
J1C "70246-2622" HDR2X13_CEN_LP 156.95,92.6 r180 top
J2 "MDJ-F-06" MDJ-F-06 129.35,114.9 r270 top
J2C "KLD-0202-B" KLD-0202 103.505,114.935 r270 top locked
J3 "MDJ-F-06" MDJ-F-06 146.95,114.9 r270 top
J4 "DB9 Female" DSUB1.385-2H9 27.305,114.935 r0 top locked
J5 "Dsub-15-Female-HD" DB15-VGA-Female 62.484,100.965 r0 top locked
J6 "ST-3150-5N" ST-3150-5N 23.55,-0.05 r180 top
JP1 "Header 2X2" HDR2X2_B 74.295,3.81 r0 top locked
JP2 "Header 2X2" HDR2X2_B 109.855,3.81 r0 top locked
L1 "470nH" CR2012-0805#1 115.55,18.4 r180 top
L1C "Ferrite Bead 50Mhz" CC2012-0805#2 78.15,16.5 r270 top
L2C "Ferrite Bead 50Mhz" CC2012-0805#2 103.15,20.9 r270 top
LD0 "HSMH-C170" "SMD _LED" 49.53,19.685 r90 top
LD1 "HSMH-C170" "SMD _LED" 52.07,19.685 r90 top
LD2 "HSMH-C170" "SMD _LED" 54.61,19.685 r90 top
LD3 "HSMH-C170" "SMD _LED" 57.15,19.685 r90 top
LD4 "HSMH-C170" "SMD _LED" 59.69,19.685 r90 top
LD5 "HSMH-C170" "SMD _LED" 62.23,19.685 r90 top
LD6 "HSMH-C170" "SMD _LED" 64.77,19.685 r90 top
LD7 "HSMH-C170" "SMD _LED" 67.31,19.685 r90 top
LED1 "HSMH-C170" "SMD _LED" 95.25,102.87 r270 top
LED2 "HSMG-C170" "SMD _LED" 148.95,14 r0 top
LED4 "HSMH-C170" "SMD _LED" 40.95,98.4 r90 top
LED5 "HSMH-C170" "SMD _LED" 31.15,98.4 r90 top
LED6 "HSMH-C170" "SMD _LED" 37.55,98.4 r90 top
LED7 "HSMH-C170" "SMD _LED" 27.75,98.4 r90 top
LS1 "Speaker" PIN2 133.35,58.42 r0 top
LS2 "Speaker" PIN2 29.21,58.42 r0 top
P1 "R09A12V01-A502-15E (2x5k log)" R09A12V01-E 40.55,10.16 r0 top
R1 "10R" CR2012-0805#1 6.75,10.8 r0 top
R1C "10K" CC2012-0805#2 150.15,62.7 r90 top
R2 "68R" CR2012-0805#1 6.75,13.4 r0 top
R2C "10K" CC2012-0805#2 152.55,62.7 r90 top
R3 "68R" CR2012-0805#1 23.15,19.8 r180 top
R3C "10K" CC2012-0805#2 147.75,62.7 r90 top
R4 "100k" CR2012-0805#1 2.55,10.8 r180 top
R4C "10K" CC2012-0805#2 149.65,67 r270 top
R5 "100k" CR2012-0805#1 23.35,23 r90 top
R5C "10K" CC2012-0805#2 154.95,62.7 r270 top
R6 "10R" CR2012-0805#1 4.35,40.4 r90 top
R6C "10K" CC2012-0805#2 149.65,70.8 r90 top
R7 "6K8" CR2012-0805#1 5.75,24 r270 top
R7C "10K" CC2012-0805#2 66.85,28.1 r90 bottom
R8 "6K8" CR2012-0805#1 2.75,24 r90 top
R8C "10K" CC2012-0805#2 64.15,29.1 r90 bottom
R9 "4k7" CR2012-0805#1 45.95,60.8 r90 top
R9C "10K" CC2012-0805#2 104.05,30.5 r90 bottom
R10 "4k7" CR2012-0805#1 58.55,61 r90 top
R10C "4k7" CC2012-0805#2 151.95,83.8 r90 top
R11 "4k7" CR2012-0805#1 46.55,3.4 r90 bottom
R11C "4k7" CR2012-0805#1 150.55,99 r270 top
R12 "4k7" CR2012-0805#1 48.95,8.7 r90 bottom
R12C "4k7" CR2012-0805#1 145.35,99 r270 top
R13 "4k7" CR2012-0805#1 52.07,7.62 r90 bottom
R13C "4k7" CR2012-0805#1 142.75,99 r270 top
R14 "4k7" CR2012-0805#1 55.88,8.255 r90 bottom
R14C "4k7" CR2012-0805#1 132.35,99 r270 top
R15 "4k7" CR2012-0805#1 59.69,7.62 r90 bottom
R15C "4k7" CR2012-0805#1 129.75,99 r270 top
R16 "4k7" CR2012-0805#1 63.5,8.255 r90 bottom
R16C "4k7" CR2012-0805#1 140.15,99 r270 top
R17 "4k7" CR2012-0805#1 67.31,7.62 r90 bottom
R17C "4k7" CR2012-0805#1 147.95,99 r270 top
R18 "4k7" CR2012-0805#1 73.75,9.8 r90 bottom
R18C "100R" CC2012-0805#2 145.35,62.7 r270 top
R19 "4k7" CR2012-0805#1 71.15,61 r90 top
R19C "100R" CR2012-0805#1 124.55,99 r270 top
R20 "4k7" CR2012-0805#1 83.95,61 r90 top
R20C "100R" CR2012-0805#1 159.45,63 r180 top
R21 "4k7" CR2012-0805#1 157.75,13.2 r270 top
R21C "100R" CR2012-0805#1 146.75,83.8 r90 top
R22 "4k7" CR2012-0805#1 96.52,60.96 r90 top
R22C "100R" CR2012-0805#1 149.35,83.8 r90 top
R23 "4k7" CR2012-0805#1 109.22,60.96 r90 top
R23C "100R" CR2012-0805#1 157.15,83.8 r90 top
R24 "100R" CR2012-0805#1 133.55,13.4 r90 top
R24C "100R" CR2012-0805#1 159.75,83.8 r90 top
R25 "270R" CR2012-0805#1 52.705,86.995 r270 bottom
R25C "100R" CR2012-0805#1 153.15,99 r90 top
R26 "270R" CR2012-0805#1 65.405,86.995 r270 bottom
R26C "100R" CR2012-0805#1 154.55,83.8 r90 top
R27 "270R" CR2012-0805#1 78.105,86.995 r270 bottom
R28 "270R" CR2012-0805#1 90.805,86.995 r270 bottom
R28C "120R 1%" CR2012-0805#1 9.75,61.6 r270 top
R29 "270R" CR2012-0805#1 55.88,85.725 r270 bottom
R29C "220R 1%" CR2012-0805#1 4.55,61.6 r270 top
R30 "270R" CR2012-0805#1 68.58,85.725 r270 bottom
R30C "1K8 1%" CR2012-0805#1 7.15,61.6 r270 top
R31 "270R" CR2012-0805#1 81.28,85.725 r270 bottom
R31C "270R 1%" CR2012-0805#1 154.94,22.86 r0 top
R32 "270R" CR2012-0805#1 93.98,85.725 r270 bottom
R32C "68R 1%" CR2012-0805#1 154.94,20.32 r180 top
R33 "270R" CR2012-0805#1 52.705,80.645 r90 bottom
R33C "Do Not Install" CC2012-0805#2 154.95,17.9 r0 top
R34 "270R" CR2012-0805#1 65.405,80.645 r90 bottom
R35 "270R" CR2012-0805#1 78.105,80.645 r90 bottom
R36 "270R" CR2012-0805#1 90.805,80.645 r90 bottom
R37 "270R" CR2012-0805#1 49.53,79.375 r90 bottom
R38 "270R" CR2012-0805#1 62.23,79.375 r90 bottom
R39 "270R" CR2012-0805#1 74.93,79.375 r90 bottom
R40 "270R" CR2012-0805#1 87.63,79.375 r90 bottom
R41 "270R" CR2012-0805#1 46.35,80.62 r90 bottom
R42 "270R" CR2012-0805#1 59.055,80.645 r90 bottom
R43 "270R" CR2012-0805#1 71.755,80.645 r90 bottom
R44 "270R" CR2012-0805#1 84.455,80.645 r90 bottom
R45 "270R" CR2012-0805#1 49.53,85.725 r270 bottom
R46 "270R" CR2012-0805#1 62.23,85.725 r270 bottom
R47 "270R" CR2012-0805#1 74.93,85.725 r270 bottom
R48 "270R" CR2012-0805#1 87.63,85.725 r270 bottom
R49 "270R" CR2012-0805#1 46.355,86.995 r270 bottom
R50 "270R" CR2012-0805#1 59.055,86.995 r270 bottom
R51 "270R" CR2012-0805#1 71.755,86.995 r270 bottom
R52 "270R" CR2012-0805#1 84.455,86.995 r270 bottom
R53 "270R" CR2012-0805#1 55.88,79.375 r90 bottom
R54 "270R" CR2012-0805#2 68.58,79.375 r90 bottom
R55 "270R" CR2012-0805#1 81.35,79.42 r90 bottom
R56 "270R" CR2012-0805#1 93.98,79.375 r90 bottom
R57 "270R" CR2012-0805#1 103.505,86.995 r270 bottom
R58 "270R" CR2012-0805#1 116.205,86.995 r270 bottom
R59 "270R" CR2012-0805#1 106.68,85.725 r270 bottom
R60 "270R" CR2012-0805#1 119.38,85.725 r270 bottom
R61 "270R" CR2012-0805#3 103.55,80.62 r90 bottom
R62 "270R" CR2012-0805#1 116.205,80.645 r90 bottom
R63 "270R" CR2012-0805#1 100.35,79.42 r90 bottom
R64 "270R" CR2012-0805#1 113.03,79.375 r90 bottom
R65 "270R" CR2012-0805#1 97.15,80.62 r90 bottom
R66 "270R" CR2012-0805#1 109.855,80.645 r90 bottom
R67 "270R" CR2012-0805#1 100.33,85.725 r270 bottom
R68 "270R" CR2012-0805#1 113.03,85.725 r270 bottom
R69 "270R" CR2012-0805#1 97.155,86.995 r270 bottom
R70 "270R" CR2012-0805#1 109.855,86.995 r270 bottom
R71 "270R" CR2012-0805#1 106.68,79.375 r90 bottom
R72 "270R" CR2012-0805#1 119.38,79.375 r90 bottom
R73 "270R" CR2012-0805#1 155.15,13.2 r90 top
R74 "270R" CR2012-0805#1 49.53,15.24 r90 top
R75 "270R" CR2012-0805#1 52.07,15.24 r90 top
R76 "270R" CR2012-0805#1 54.61,15.24 r90 top
R77 "270R" CR2012-0805#1 57.15,15.24 r90 top
R78 "270R" CR2012-0805#1 59.69,15.24 r90 top
R79 "270R" CR2012-0805#1 62.23,15.24 r90 top
R80 "270R" CR2012-0805#1 64.77,15.24 r90 top
R81 "270R" CR2012-0805#1 67.31,15.24 r90 top
R82 "2k2" CR2012-0805#1 130.95,13.4 r90 top
R83 "390R" CR2012-0805#1 95.25,107.315 r270 top
R84 "4k7" CR2012-0805#1 155.75,99 r270 top
R85 "4k7" CR2012-0805#1 156.15,103.4 r270 top
R86 "4k7" CR2012-0805#1 120.35,103.6 r270 top
R87 "4k7" CR2012-0805#1 127.15,99 r90 top
R88 "100R" CR2012-0805#1 121.95,99 r90 top
R89 "100R" CR2012-0805#1 119.35,99 r90 top
R90 "100R" CR2012-0805#1 34.35,98.4 r270 top
R91 "100R" CR2012-0805#1 24.325,99.375 r180 top
R92 "100R" CR2012-0805#1 123.825,83.82 r90 top
R93 "100R" CR2012-0805#1 158.35,99 r270 top
R94 "100R" CR2012-0805#1 48.35,100 r90 top
R95 "100R" CR2012-0805#1 79.55,95 r90 top
R96 "270R" CR2012-0805#1 45.75,100 r270 top
R97 "270R" CR2012-0805#1 45.75,104.4 r90 top
R98 "270R" CR2012-0805#1 48.35,104.4 r90 top
R99 "270R" CR2012-0805#1 45.75,108.6 r270 top
R100 "680R" CR2012-0805#1 56.15,95 r90 top
R101 "680R" CR2012-0805#1 53.55,95 r90 top
R102 "680R" CR2012-0805#1 50.95,95 r90 top
R103 "680R" CR2012-0805#1 61.35,95 r90 top
R104 "680R" CR2012-0805#1 58.75,95 r90 top
R105 "680R" CR2012-0805#1 63.95,95 r90 top
R106 "680R" CR2012-0805#1 71.75,95 r90 top
R107 "680R" CR2012-0805#1 69.15,95 r90 top
R108 "680R" CR2012-0805#1 74.35,95 r90 top
R109 "330R" CR2012-0805#1 48.35,95 r90 top
R110 "330R" CR2012-0805#1 66.55,95 r90 top
R111 "330R" CR2012-0805#1 76.95,95 r90 top
R112 "470K" CR2012-0805#1 124.46,20.955 r0 top
R113 "10R" CR2012-0805#1 19.35,19.8 r180 top
R114 "do not mount" CR2012-0805#1 40.35,12.8 r0 top
R115 "do not mount" CR2012-0805#1 32.75,7.4 r90 top
R116 "22k" CR2012-0805#1 18.15,45.8 r0 top
R117 "22k" CR2012-0805#1 5.15,48.4 r0 top
R118 "33k" CR2012-0805#1 18.15,48.4 r180 top
R119 "33k" CR2012-0805#1 5.15,51 r0 top
R120 "10k" CR2012-0805#1 15.4,58.6 r0 top
R121 "10k" CR2012-0805#1 11.35,58.6 r180 top
R122 "47R" CR2012-0805#1 115.35,12.2 r0 top
RN1 "10X-102-4k7" SIL-10/X1.2 14.605,36.195 r180 top
RN2 "10X-102-4k7" SIL-10/X1.2 14.605,28.575 r180 top
S1 "A6ER-8104" DIP-16-KEY 49.53,4 r0 top locked
SW1 "DTSM-61-NR" B3FS_SWITCH 50.8,57.785 r270 top locked
SW2 "DTSM-61-NR" B3FS_SWITCH 63.5,57.785 r270 top locked
SW3 "DTSM-61-NR" B3FS_SWITCH 76.2,57.785 r270 top locked
SW4 "DTSM-61-NR" B3FS_SWITCH 88.9,57.785 r270 top locked
SW5 "DTSM-61-NR" B3FS_SWITCH 101.6,57.785 r270 top locked
SW6 "DTSM-61-NR" B3FS_SWITCH 114.3,57.785 r270 top locked
SW7 "DTSM-61-NR" B3FS_SWITCH 148.95,8.2 r180 top
TP1C "(TMS)" TestPin 149.45,56 r90 top
TP2C "(TCK)" TestPin 152.25,56 r90 top
TP3C "(TDI)" TestPin 155.15,56 r90 top
TP4C "(TDO)" TestPin 158.05,56 r90 top
TP5C "(5V)" TestPin 118.95,111.8 r90 top
TP6C "(3V3)" TestPin 45.95,57.2 r90 top
TP7C "(1V5)" TestPin 160.655,34.29 r90 top
U1 "LM4880M" M08A 11.75,50.6 r90 top
U1C "SN74LV244W" SSO-G20/P.65 156.15,69.2 r270 top
U2 "LMV358M" M08A 14.55,22.6 r0 top
U2C "LM1084IS-ADJ" TO-263 7.61,66.95 r0 top
U3 "SN74LV04D" D014 121.92,15.24 r180 top
U3C "LM1084IS-ADJ" TO-263 148.55,23.495 r90 top
U4 "MAX3232CSE" TSSO5x6-G16 19.55,96.6 r0 top
U5 "SRAM 256Kx16 TSOP44" SO-G44/P.8 57.785,34.29 r270 top
U6 "SRAM 256Kx16 TSOP44" SO-G44/P.8 107.15,34.2 r270 top

## Footprints (in the part's own frame and the unit in brackets; to place one, negate y for a bottom-side part, rotate by r counter-clockwise, add the part's x,y. Pads: shape width x height; smd on the part's side, far side on the other; paste and mask are expansions set on the pad)
Altium [mm] "Altium Logo"
  silkscreen extent 0,-0.08 17.6,3.84
B3FS_SWITCH [mm]
  rect 1.6x1.4 smd: 1(4.01,-2.25) 2(-4,-2.25) 3(4.01,2.24) 4(-4,2.24)
  silkscreen extent -3.16,-3.16 3.15,3.15
"CAP D5MM/P2MM" [mil]
  rect 60x60 hole 27.56: 1(0,0)
  round 60 hole 27.56: 2(78.74,0)
  silkscreen extent -59,-98 138,98
"CAP D5mm/P2mm" [mil]
  rect 60x60 hole 27.56: 1(0,0)
  round 60 hole 27.56: 2(78.74,0)
  silkscreen extent -59,-98 138,98
CC1608-0603 [mm]
  rect 1.1x1 smd: 1(-0.85,0) 2(0.85,0)
  silkscreen extent -0.8,-0.7 0.8,0.7
CC2012-0805#1 [mm]
  rect 1.3x1.5 smd: 1(-0.95,0) 2(0.95,0)
  silkscreen extent -1.1,-1 1.1,1
CC2012-0805#2 [mm]
  rect 1.3x1.5 smd: 1(-0.95,0.003) 2(0.95,0.003)
  silkscreen extent -1,-0.9 1,0.9
CC3216-1206 [mm]
  rect 1.6x1.8 smd: 1(-1.4,0) 2(1.4,0)
  silkscreen extent -1.7,-1.15 1.7,1.15
CR2012-0805#1 [mm]
  rect 1.3x1.5 smd: 1(-0.95,0) 2(0.95,0)
  silkscreen extent -1.1,-1 1.1,1
CR2012-0805#2 [mm]
  rect 1.3x1.5 smd: 1(-0.95,0) 2(0.972,0.043)
  silkscreen extent -1.1,-1 1.1,1
CR2012-0805#3 [mm]
  rect 1.3x1.5 smd: 1(-0.945,-0.01) 2(0.95,0)
  silkscreen extent -1.1,-1 1.1,1
D014 [mm] "Small Outline; 14 Leads; Body Width 3.9 mm; Pitch 1.27 mm"
  rect 0.6x2.05 smd: 1(-3.81,-2.675) 2(-2.54,-2.675) 3(-1.27,-2.675) 4(0,-2.675) 5(1.27,-2.675) 6(2.54,-2.675) 7(3.81,-2.675) 8(3.81,2.675) 9(2.54,2.675) 10(1.27,2.675) 11(0,2.675) 12(-1.27,2.675) 13(-2.54,2.675) 14(-3.81,2.675)
  silkscreen extent -4.78,-2.8 4.38,1.25
DB15-VGA-Female [mm]
  rect 1.6x1.6 hole 1.1: 1(0,0)
  round 1.6 hole 1.1: 2(2.29,0) 3(4.58,0) 4(6.87,0) 5(9.16,0) 6(-1.4,2.54) 7(0.89,2.54) 8(3.18,2.54) 9(5.47,2.54) 10(7.76,2.54) 11(0,5.08) 12(2.29,5.08) 13(4.58,5.08) 14(6.87,5.08) 15(9.16,5.08)
  round 5 hole 3.3: 16(-7.915,2.54) 17(17.075,2.54)
  silkscreen extent -10.83,-2.65 20.01,19.61
DIP-16-KEY [mm]
  rect 1.5x1.5 hole 0.9: 1(0,0)
  round 1.5 hole 0.9: 2(2.54,0) 3(5.08,0) 4(7.62,0) 5(10.16,0) 6(12.7,0) 7(15.24,0) 8(17.78,0) 9(17.78,7.62) 10(15.24,7.62) 11(12.7,7.62) 12(10.16,7.62) 13(7.62,7.62) 14(5.08,7.62) 15(2.54,7.62) 16(0,7.62)
  silkscreen extent -2.05,-1.59 19.83,9.2
DO214 [mil]
  rect 85x110 smd: 1(-87.5,0) 2(87.5,0)
  silkscreen extent -90,-78 90,78
DSUB1.385-2H9 [mm]
  rect 1.69x1.69 hole 1.1: 1(-5.54,-10.92)
  round 1.69 hole 1.1: 2(-2.77,-10.92) 3(0,-10.92) 4(2.77,-10.92) 5(5.54,-10.92) 6(-4.155,-8.08) 7(-1.385,-8.08) 8(1.385,-8.08) 9(4.155,-8.08)
  round 4.76 hole 3.3: 10(-12.495,-9.5) 11(12.495,-9.5)
  silkscreen extent -15.4,-12.4 15.4,6
FBGA324 [mm] "324-Pin Non-Thermally Enhanced FineLine Ball-Grid Array (FBGA)"
  round 0.4 smd: A1(-8.5,8.5) A2(-7.5,8.5) A3(-6.5,8.5) A4(-5.5,8.5) A5(-4.5,8.5) A6(-3.5,8.5) A7(-2.5,8.5) A8(-1.5,8.5) A9(-0.5,8.5) A10(0.5,8.5) A11(1.5,8.5) A12(2.5,8.5) A13(3.5,8.5) A14(4.5,8.5) A15(5.5,8.5) A16(6.5,8.5) A17(7.5,8.5) A18(8.5,8.5) B1(-8.5,7.5) B2(-7.5,7.5) B3(-6.5,7.5) B4(-5.5,7.5) B5(-4.5,7.5) B6(-3.5,7.5) B7(-2.5,7.5) B8(-1.5,7.5) B9(-0.5,7.5) B10(0.5,7.5) B11(1.5,7.5) B12(2.5,7.5) B13(3.5,7.5) B14(4.5,7.5) B15(5.5,7.5) B16(6.5,7.5) B17(7.5,7.5) B18(8.5,7.5) C1(-8.5,6.5) C2(-7.5,6.5) C3(-6.5,6.5) C4(-5.5,6.5) C5(-4.5,6.5) C6(-3.5,6.5) C7(-2.5,6.5) C8(-1.5,6.5) C9(-0.5,6.5) C10(0.5,6.5) C11(1.5,6.5) C12(2.5,6.5) C13(3.5,6.5) C14(4.5,6.5) C15(5.5,6.5) C16(6.5,6.5) C17(7.5,6.5) C18(8.5,6.5) D1(-8.5,5.5) D2(-7.5,5.5) D3(-6.5,5.5) D4(-5.5,5.5) D5(-4.5,5.5) D6(-3.5,5.5) D7(-2.5,5.5) D8(-1.5,5.5) D9(-0.5,5.5) D10(0.5,5.5) D11(1.5,5.5) D12(2.5,5.5) D13(3.5,5.5) D14(4.5,5.5) D15(5.5,5.5) D16(6.5,5.5) D17(7.5,5.5) D18(8.5,5.5) E1(-8.5,4.5) E2(-7.5,4.5) E3(-6.5,4.5) E4(-5.5,4.5) E5(-4.5,4.5) E6(-3.5,4.5) E7(-2.5,4.5) E8(-1.5,4.5) E9(-0.5,4.5) E10(0.5,4.5) E11(1.5,4.5) E12(2.5,4.5) E13(3.5,4.5) E14(4.5,4.5) E15(5.5,4.5) E16(6.5,4.5) E17(7.5,4.5) E18(8.5,4.5) F1(-8.5,3.5) F2(-7.5,3.5) F3(-6.5,3.5) F4(-5.5,3.5) F5(-4.5,3.5) F6(-3.5,3.5) F7(-2.5,3.5) F8(-1.5,3.5) F9(-0.5,3.5) F10(0.5,3.5) F11(1.5,3.5) F12(2.5,3.5) F13(3.5,3.5) F14(4.5,3.5) F15(5.5,3.5) F16(6.5,3.5) F17(7.5,3.5) F18(8.5,3.5) G1(-8.5,2.5) G2(-7.5,2.5) G3(-6.5,2.5) G4(-5.5,2.5) G5(-4.5,2.5) G6(-3.5,2.5) G7(-2.5,2.5) G8(-1.5,2.5) G9(-0.5,2.5) G10(0.5,2.5) G11(1.5,2.5) G12(2.5,2.5) G13(3.5,2.5) G14(4.5,2.5) G15(5.5,2.5) G16(6.5,2.5) G17(7.5,2.5) G18(8.5,2.5) H1(-8.5,1.5) H2(-7.5,1.5) H3(-6.5,1.5) H4(-5.5,1.5) H5(-4.5,1.5) H6(-3.5,1.5) H7(-2.5,1.5) H8(-1.5,1.5) H9(-0.5,1.5) H10(0.5,1.5) H11(1.5,1.5) H12(2.5,1.5) H13(3.5,1.5) H14(4.5,1.5) H15(5.5,1.5) H16(6.5,1.5) H17(7.5,1.5) H18(8.5,1.5) J1(-8.5,0.5) J2(-7.5,0.5) J3(-6.5,0.5) J4(-5.5,0.5) J5(-4.5,0.5) J6(-3.5,0.5) J7(-2.5,0.5) J8(-1.5,0.5) J9(-0.5,0.5) J10(0.5,0.5) J11(1.5,0.5) J12(2.5,0.5) J13(3.5,0.5) J14(4.5,0.5) J15(5.5,0.5) J16(6.5,0.5) J17(7.5,0.5) J18(8.5,0.5) K1(-8.5,-0.5) K2(-7.5,-0.5) K3(-6.5,-0.5) K4(-5.5,-0.5) K5(-4.5,-0.5) K6(-3.5,-0.5) K7(-2.5,-0.5) K8(-1.5,-0.5) K9(-0.5,-0.5) K10(0.5,-0.5) K11(1.5,-0.5) K12(2.5,-0.5) K13(3.5,-0.5) K14(4.5,-0.5) K15(5.5,-0.5) K16(6.5,-0.5) K17(7.5,-0.5) K18(8.5,-0.5) L1(-8.5,-1.5) L2(-7.5,-1.5) L3(-6.5,-1.5) L4(-5.5,-1.5) L5(-4.5,-1.5) L6(-3.5,-1.5) L7(-2.5,-1.5) L8(-1.5,-1.5) L9(-0.5,-1.5) L10(0.5,-1.5) L11(1.5,-1.5) L12(2.5,-1.5) L13(3.5,-1.5) L14(4.5,-1.5) L15(5.5,-1.5) L16(6.5,-1.5) L17(7.5,-1.5) L18(8.5,-1.5) M1(-8.5,-2.5) M2(-7.5,-2.5) M3(-6.5,-2.5) M4(-5.5,-2.5) M5(-4.5,-2.5) M6(-3.5,-2.5) M7(-2.5,-2.5) M8(-1.5,-2.5) M9(-0.5,-2.5) M10(0.5,-2.5) M11(1.5,-2.5) M12(2.5,-2.5) M13(3.5,-2.5) M14(4.5,-2.5) M15(5.5,-2.5) M16(6.5,-2.5) M17(7.5,-2.5) M18(8.5,-2.5) N1(-8.5,-3.5) N2(-7.5,-3.5) N3(-6.5,-3.5) N4(-5.5,-3.5) N5(-4.5,-3.5) N6(-3.5,-3.5) N7(-2.5,-3.5) N8(-1.5,-3.5) N9(-0.5,-3.5) N10(0.5,-3.5) N11(1.5,-3.5) N12(2.5,-3.5) N13(3.5,-3.5) N14(4.5,-3.5) N15(5.5,-3.5) N16(6.5,-3.5) N17(7.5,-3.5) N18(8.5,-3.5) P1(-8.5,-4.5) P2(-7.5,-4.5) P3(-6.5,-4.5) P4(-5.5,-4.5) P5(-4.5,-4.5) P6(-3.5,-4.5) P7(-2.5,-4.5) P8(-1.5,-4.5) P9(-0.5,-4.5) P10(0.5,-4.5) P11(1.5,-4.5) P12(2.5,-4.5) P13(3.5,-4.5) P14(4.5,-4.5) P15(5.5,-4.5) P16(6.5,-4.5) P17(7.5,-4.5) P18(8.5,-4.5) R1(-8.5,-5.5) R2(-7.5,-5.5) R3(-6.5,-5.5) R4(-5.5,-5.5) R5(-4.5,-5.5) R6(-3.5,-5.5) R7(-2.5,-5.5) R8(-1.5,-5.5) R9(-0.5,-5.5) R10(0.5,-5.5) R11(1.5,-5.5) R12(2.5,-5.5) R13(3.5,-5.5) R14(4.5,-5.5) R15(5.5,-5.5) R16(6.5,-5.5) R17(7.5,-5.5) R18(8.5,-5.5) T1(-8.5,-6.5) T2(-7.5,-6.5) T3(-6.5,-6.5) T4(-5.5,-6.5) T5(-4.5,-6.5) T6(-3.5,-6.5) T7(-2.5,-6.5) T8(-1.5,-6.5) T9(-0.5,-6.5) T10(0.5,-6.5) T11(1.5,-6.5) T12(2.5,-6.5) T13(3.5,-6.5) T14(4.5,-6.5) T15(5.5,-6.5) T16(6.5,-6.5) T17(7.5,-6.5) T18(8.5,-6.5) U1(-8.5,-7.5) U2(-7.5,-7.5) U3(-6.5,-7.5) U4(-5.5,-7.5) U5(-4.5,-7.5) U6(-3.5,-7.5) U7(-2.5,-7.5) U8(-1.5,-7.5) U9(-0.5,-7.5) U10(0.5,-7.5) U11(1.5,-7.5) U12(2.5,-7.5) U13(3.5,-7.5) U14(4.5,-7.5) U15(5.5,-7.5) U16(6.5,-7.5) U17(7.5,-7.5) U18(8.5,-7.5) V1(-8.5,-8.5) V2(-7.5,-8.5) V3(-6.5,-8.5) V4(-5.5,-8.5) V5(-4.5,-8.5) V6(-3.5,-8.5) V7(-2.5,-8.5) V8(-1.5,-8.5) V9(-0.5,-8.5) V10(0.5,-8.5) V11(1.5,-8.5) V12(2.5,-8.5) V13(3.5,-8.5) V14(4.5,-8.5) V15(5.5,-8.5) V16(6.5,-8.5) V17(7.5,-8.5) V18(8.5,-8.5)
  silkscreen extent -10.27,-9.5 9.5,9.5
HDR1X2 [mm]
  rect 1.5x1.5 hole 0.9: 1(0,0)
  round 1.5 hole 0.9: 2(2.54,0)
  silkscreen extent -1.27,-1.27 3.81,1.27
HDR2X2_B [mm]
  rect 1.5x1.5 hole 0.9: 1(0,0)
  round 1.5 hole 0.9: 2(0,2.54) 3(2.54,0) 4(2.54,2.54)
  silkscreen extent -1.27,-1.27 3.81,3.81
HDR2X10 [mm]
  rect 1.5x1.5 hole 0.9: 1(0,0)
  round 1.5 hole 0.9: 2(0,2.54) 3(2.54,0) 4(2.54,2.54) 5(5.08,0) 6(5.08,2.54) 7(7.62,0) 8(7.62,2.54) 9(10.16,0) 10(10.16,2.54) 11(12.7,0) 12(12.7,2.54) 13(15.24,0) 14(15.24,2.54) 15(17.78,0) 16(17.78,2.54) 17(20.32,0) 18(20.32,2.54) 19(22.86,0) 20(22.86,2.54)
  silkscreen extent -1.27,-1.27 24.13,3.81
HDR2X13_CEN_LP [mm]
  rect 1.5x1.5 hole 0.9: 1(0,0)
  round 1.5 hole 0.9: 2(2.54,0) 3(5.08,0) 4(7.62,0) 5(10.16,0) 6(12.7,0) 7(15.24,0) 8(17.78,0) 9(20.32,0) 10(22.86,0) 11(25.4,0) 12(27.94,0) 13(30.48,0) 14(0,2.54) 15(2.54,2.54) 16(5.08,2.54) 17(7.62,2.54) 18(10.16,2.54) 19(12.7,2.54) 20(15.24,2.54) 21(17.78,2.54) 22(20.32,2.54) 23(22.86,2.54) 24(25.4,2.54) 25(27.94,2.54) 26(30.48,2.54)
  silkscreen extent -5.08,-3.18 35.56,5.72
KLD-0202 [mm]
  oval 2x4.5 all layers, no hole: 1(13.7,0)
  round 1.5 hole 1: 1A(13.7,-1.25) 1B(13.7,1.25) 2A(7.5,-1) 2B(7.5,1) 3A(9.5,-5) 3B(11.5,-5)
  oval 2x4 all layers, no hole: 2(7.5,0)
  oval 4x2 all layers, no hole: 3(10.5,-5)
  silkscreen extent 0,-4.5 14.6,4.5
"Live Design Evaluation Board" [mm] "Live Design Logo"
  silkscreen extent 0.03,0 33.78,10.44
M08A [mm] "Small Outline; 8 Leads; Body Width 3.9 mm; Pitch 1.27 mm"
  rect 0.6x2.2 smd: 1(-1.905,-2.6) 2(-0.635,-2.6) 3(0.635,-2.6) 4(1.905,-2.6) 5(1.905,2.6) 6(0.635,2.6) 7(-0.635,2.6) 8(-1.905,2.6)
  silkscreen extent -2.88,-2.72 2.5,1.1
MCCT-B [mm]
  rect 2x2.2 smd: 1(-1.5,0) 2(1.5,0)
  silkscreen extent -2.3,-1.6 1.8,1.6
MDJ-F-06 [mm]
  round 1.5 hole 0.9: 1(8.5,-1.3) 2(8.5,1.3) 3(8.5,-3.4) 5(8.5,3.4) 6(11,-3.4) 8(11,3.4)
  round 3.65 hole 2.2: MH1(5.5,-6.75) MH2(4.7,0) MH3(5.5,6.75)
  silkscreen extent 0,-7 12.9,7
PIN2 [mm]
  rect 1.5x1.5 hole 0.9: 1(0,0)
  round 1.5 hole 0.9: 2(2.54,0)
  silkscreen extent -1.4,-1.4 3.94,2.17
QC49/SMD [mm]
  rect 5x2 smd: 1(-4.75,0) 2(4.75,0)
  silkscreen extent -6.75,-2.4 5.7,2.4
R09A12V01-E [mm] "www.sundiode.com/R09A-8.htm"
  round 2 hole 1: 1(0,-3.3) 2(-2.5,-5.8) 3(-2.5,-3.3) 4(2.5,-3.3) 5(2.5,-5.8)
  oval 3x3.5 hole 2.4: 6(5,0) 7(-5,0)
  silkscreen extent -4.9,-15 4.9,2.4
RB8/3.5 [mil]
  rect 70x70 hole 27.56: 1(0,60)
  round 70 hole 27.56: 2(0,-60)
  silkscreen extent -160,-160 160,160
SA/SC56 [mm] "KingBright 14.2mm (0.56\") Single Digit 7 Segment LED Display"
  rect 1.5x1.5 hole 0.7: 1(0,0)
  round 1.5 hole 0.7: 2(2.54,0) 3(5.08,0) 4(7.62,0) 5(10.16,0) 6(10.16,15.24) 7(7.62,15.24) 8(5.08,15.24) 9(2.54,15.24) 10(0,15.24)
  silkscreen extent -1.32,-1.83 11.48,17.07
"Serial Number - CYCLONE EB2V1.00" [mm]
  silkscreen extent 0,0 31.89,6.13
SIL-10/X1.2 [mil] "SIP; 10 Leads; Body 5.8 x 25.3 x 2.8 mm (typ); Pitch 2.54 mm"
  rect 60x60 hole 27.56: 1(-450,0)
  round 60 hole 27.56: 2(-350,0) 3(-250,0) 4(-150,0) 5(-50,0) 6(50,0) 7(150,0) 8(250,0) 9(350,0) 10(450,0)
  silkscreen extent -516,-59 516,59
"SMD _LED" [mm]
  rect 1.3x1.6 smd: 1(0.95,0) 2(-0.95,0)
  silkscreen extent -2.13,-1.15 2,1.15
SO-G44/P.8 [mm]
  rect 0.45x1.45 smd: 1(-8.4,-5.575) 2(-7.6,-5.575) 3(-6.8,-5.575) 4(-6,-5.575) 5(-5.2,-5.575) 6(-4.4,-5.575) 7(-3.6,-5.575) 8(-2.8,-5.575) 9(-2,-5.575) 10(-1.2,-5.575) 11(-0.4,-5.575) 12(0.4,-5.575) 13(1.2,-5.575) 14(2,-5.575) 15(2.8,-5.575) 16(3.6,-5.575) 17(4.4,-5.575) 18(5.2,-5.575) 19(6,-5.575) 20(6.8,-5.575) 21(7.6,-5.575) 22(8.4,-5.575) 23(8.4,5.575) 24(7.6,5.575) 25(6.8,5.575) 26(6,5.575) 27(5.2,5.575) 28(4.4,5.575) 29(3.6,5.575) 30(2.8,5.575) 31(2,5.575) 32(1.2,5.575) 33(0.4,5.575) 34(-0.4,5.575) 35(-1.2,5.575) 36(-2,5.575) 37(-2.8,5.575) 38(-3.6,5.575) 39(-4.4,5.575) 40(-5.2,5.575) 41(-6,5.575) 42(-6.8,5.575) 43(-7.6,5.575) 44(-8.4,5.575)
  silkscreen extent -9.3,-5.7 9.25,4.45
SSO-G20/P.65 [mm]
  rect 0.4x2.15 smd: 1(-2.925,-3.275) 2(-2.275,-3.275) 3(-1.625,-3.275) 4(-0.975,-3.275) 5(-0.325,-3.275) 6(0.325,-3.275) 7(0.975,-3.275) 8(1.625,-3.275) 9(2.275,-3.275) 10(2.925,-3.275) 11(2.925,3.275) 12(2.275,3.275) 13(1.625,3.275) 14(0.975,3.275) 15(0.325,3.275) 16(-0.325,3.275) 17(-0.975,3.275) 18(-1.625,3.275) 19(-2.275,3.275) 20(-2.925,3.275)
  silkscreen extent -3.8,-3.4 3.75,1.8
ST-3150-5N [mm]
  oval 2.7x1.8 all layers, no hole: 1(-0.85,-5.2) 2(1.15,-7.65) 3(-0.85,-11.35) 4(1.15,-13.25) 5(-0.85,-17)
  round 1.2 hole 1: 1A(-1.3,-5.2) 1B(-0.4,-5.2) 2A(0.7,-7.65) 2B(1.6,-7.65) 3A(-1.3,-11.35) 3B(-0.4,-11.35) 4A(0.7,-13.25) 4B(1.6,-13.25) 5A(-1.3,-17) 5B(-0.4,-17)
  silkscreen extent -4.9,-18 3.2,0
TestPin [mil] "SingleTest Pin"
  round 60 hole 35.43: 1(0,0)
TO-263 [mm]
  rect 1x3.4 smd: 1(0,0) 2(2.54,0) 3(5.08,0)
  rect 10.25x8.9 smd: 4(2.54,10.45)
  silkscreen extent -3.1,-3.12 8.2,15
TSSO5x6-G16 [mm] "Shrink Small Outline; 16 Leads; Body Width 4.4 mm"
  rect 0.3x1.65 smd: 1(-2.275,-2.775) 2(-1.625,-2.775) 3(-0.975,-2.775) 4(-0.325,-2.775) 5(0.325,-2.775) 6(0.975,-2.775) 7(1.625,-2.775) 8(2.275,-2.775) 9(2.275,2.775) 10(1.625,2.775) 11(0.975,2.775) 12(0.325,2.775) 13(-0.325,2.775) 14(-0.975,2.775) 15(-1.625,2.775) 16(-2.275,2.775)
  silkscreen extent -3.1,-2.9 2.55,1.55

## Part data
C1 C1C C2 C2C C3 C3C C4 C4C C5 C5C C6C C18 C19 C36 C37 C38 C51C C52C C53C C62C C63C C64C C65C C66C C67C C68C: library part CAP_POLAR, "Polar Capacitor"
C6 C7 C7C C8 C8C C9 C9C C10 C10C C11 C11C C12 C12C C13 C13C C14 C14C C15 C15C C16 C16C C17 C17C C18C C19C C20 C20C C21 C21C C22 C22C C23 C23C C24 C24C C25 C25C C26 C26C C27 C27C C28 C28C C29 C29C C30 C30C C31 C31C C32 C32C C33 C33C C34 C34C C35 C35C C36C C37C C38C C39 C39C C40C C43C C44C C45C C46C C47C C48C C49C C54C C55C C56C C57C C58C C60C C61C C69C C70C C71C: library part CAP, "Capacitor"
C40 C41: library part "CAP Electro Bipolar", "Electrolytic Bipolar Capacitor"
CR1: library part QC49/SMD, "SMD Crystal 50MHz HY-Q"
D1C: library part BZG03C13, "Zener Diode, 6.2V, 5W"
DS1 DS2 DS3 DS4 DS5 DS6: "14.2 mm General Purpose 7-Segment Display: CC, RH DP"
FPGA1C: "Cyclone Family, 1.5V FPGA, 249 I/O Pins, 2 x PLLs, Commercial Grade, Speed Grade 6"
GJ1C GJ2C GJ3C GJ4C: "Header, 2-Pin"
HDR1 HDR2: "Header, 10-Pin, Dual row"
J1 J6: "3-Conductor Jack with 2 break contacts (normals) and 2 auxiliary make contacts"
J1C: library part "Header 13X2A", "Header, 13-Pin, Dual row"
J2 J3: "Circular DIN, 6 Postion, Jack, Pitch 2.1/2.6 mm"
J2C: "Low Voltage Power Supply Connector"
J4: library part "D Connector 9", "Receptacle Assembly, 9 Position, Right Angle"
J5: "Dsub-15 High density VGA Female connetor"
JP1 JP2: "Header, 2-Pin, Dual row"
L1: library part Inductor, "Inductor"
L1C L2C: library part Inductor, "Farnell part 323-7989"
LD0 LD1 LD2 LD3 LD4 LD5 LD6 LD7 LED1 LED4 LED5 LED6 LED7: library part HSMX-C670, "Typical RED GaAs SMD LED Agilent make"
LED2: library part HSMX-C670, "Typical GREEN GaAs SMD LED Agilent make"
LS1 LS2: "Loudspeaker"
P1: library part "POT Dual Gang Shield", "Sunrise Company Stereo Pot"
R1 R1C R2 R2C R3 R3C R4 R4C R5 R5C R6 R6C R7 R7C R8 R8C R9 R9C R10 R10C R11 R11C R12 R12C R13 R13C R14 R14C R15 R15C R16 R16C R17 R17C R18 R18C R19 R19C R20 R20C R21 R21C R22 R22C R23 R23C R24 R24C R25 R25C R26 R26C R27 R28 R28C R29 R29C R30 R30C R31 R31C R32 R32C R33 R33C R34 R35 R36 R37 R38 R39 R40 R41 R42 R43 R44 R45 R46 R47 R48 R49 R50 R51 R52 R53 R54 R55 R56 R57 R58 R59 R60 R61 R62 R63 R64 R65 R66 R67 R68 R69 R70 R71 R72 R73 R74 R75 R76 R77 R78 R79 R80 R81 R82 R83 R84 R85 R86 R87 R88 R89 R90 R91 R92 R93 R94 R95 R96 R97 R98 R99 R100 R101 R102 R103 R104 R105 R106 R107 R108 R109 R110 R111 R112 R113 R114 R115 R116 R117 R118 R119 R120 R121 R122: library part RES, "Resistor"
RN1 RN2: library part 10X-102, "Resistor network SIL 5 individual resistors, 10 pins"
S1: "DIP Switch Side actuator long liver Piano Key"
SW1 SW2 SW3 SW4 SW5 SW6 SW7: library part B3FS, "SPNA SMD Keyboard Switch"
TP1C TP2C TP3C TP4C TP5C TP6C TP7C: library part TestPin
U1: "Dual 250mW Audio Amplifier with Shutdown Mode"
U1C: library part SN54LV244W, "Octal Buffer/Driver with 3-State Outputs"
U2: "Dual General-Purpose, Low-Voltage Rail-to-Rail Output Operational Amplifier"
U2C U3C: "5A Low Dropout Positive Regulators"
U3: "Hex Inverter"
U4: library part MAX3232EUE, "3.0V TO 5.5V, Low-Power, up to 1Mbps, True RS-232 Transceiver Using Four 0.1µF External Capacitor"
U5 U6: library part "SRAM 512Kx16 TSOP44", "512Kx16Bit SRAM TSOP44"

## Free pads (board coordinates)
  round 8 / inner round 6.35 / far side round 8 hole 3.175: 0(5.08,5.08) 0(5.08,109.931) 0(159.918,5.08) 0(159.969,109.931)
  round 1 smd far side mask+1.8: FID0(145.15,6.7) FID3(95.85,16.8) FID4(67.975,51) FID7(138.15,105.2) FID8(18.95,109.3)
  round 1 smd mask+1.8: FID1(95.85,16.8) FID2(67.975,51) FID5(18.95,109.3) FID6(138.15,105.2)
  round 5 hole 18.5 unplated: H-SPK2(134.62,73.66) H_SPK1(30.48,73.66)
  round 0.3 hole 0.8 unplated: MB(53.1,115.011) MB(53.1,0) MB(54.2,115.011) MB(54.2,0) MB(55.3,115.011) MB(55.3,0) MB(109.8,115.011) MB(109.8,0) MB(110.9,115.011) MB(110.9,0) MB(112,115.011) MB(112,0)
  round 1.6 on Mech2: PSM(1.75,67) PSM(1.75,68.8) PSM(4.25,93.6) PSM(4.3,86.4) PSM(4.3,97.2) PSM(4.35,90) PSM(4.4,70) PSM(5.3,95.4) PSM(5.35,88.2) PSM(5.35,91.8) PSM(5.4,71.8) PSM(5.4,84.6) PSM(6.3,93.6) PSM(6.35,86.4) PSM(6.35,97.2) PSM(6.4,70) PSM(6.4,90) PSM(7.35,71.8) PSM(7.35,91.8) PSM(7.35,95.4) PSM(7.4,84.6) PSM(7.4,88.2) PSM(8.3,93.6) PSM(8.35,86.4) PSM(8.4,70) PSM(8.4,90) PSM(9.35,71.8) PSM(9.35,91.8) PSM(9.4,84.6) PSM(9.4,88.2) PSM(10.3,93.6) PSM(10.35,86.4) PSM(10.35,90) PSM(10.4,70) PSM(11.35,71.8) PSM(11.4,84.6) PSM(11.4,88.2) PSM(12.35,86.4) PSM(12.4,70) PSM(12.4,90) PSM(13.35,71.8) PSM(13.35,84.6) PSM(13.4,88.2) PSM(14.3,86.4) PSM(14.35,67) PSM(14.35,90) PSM(14.4,70) PSM(15.35,71.8) PSM(15.35,84.6) PSM(15.35,88.2) PSM(16.15,67) PSM(16.35,70) PSM(16.35,86.4) PSM(16.4,90) PSM(17.4,77.4) PSM(17.4,81) PSM(17.4,84.6) PSM(17.4,88.2) PSM(18.35,79.2) PSM(18.35,86.4) PSM(18.4,82.8) PSM(18.4,90) PSM(19.4,81) PSM(19.4,84.6) PSM(19.4,88.2) PSM(20.35,82.8) PSM(20.35,86.4) PSM(20.35,90) PSM(21.35,88.2) PSM(21.4,84.6) PSM(22.35,86.4) PSM(22.35,90) PSM(23.35,88.2) PSM(24.35,86.4) PSM(24.35,90) PSM(26.2,87.1) PSM(28.2,87.1) PSM(30.2,87.1) PSM(124.35,40.3) PSM(125.35,31.2) PSM(125.35,38.4) PSM(126.35,33) PSM(126.35,36.6) PSM(126.35,40.3) PSM(127.35,31.2) PSM(127.35,34.8) PSM(127.35,38.4) PSM(128.35,33) PSM(128.35,36.6) PSM(128.35,40.3) PSM(129.35,31.2) PSM(129.35,34.8) PSM(129.35,38.4) PSM(130.35,29.4) PSM(130.35,33) PSM(130.35,36.6) PSM(130.35,40.3) PSM(131.35,16.8) PSM(131.35,20.4) PSM(131.35,24) PSM(131.35,27.6) PSM(131.35,31.2) PSM(131.35,34.8) PSM(131.35,38.4) PSM(132.35,18.6) PSM(132.35,22.2) PSM(132.35,25.8) PSM(132.35,29.4) PSM(132.35,33) PSM(132.35,36.6) PSM(132.35,40.3) PSM(133.35,16.8) PSM(133.35,34.8) PSM(133.35,38.4) PSM(134.35,18.6) PSM(134.35,33) PSM(134.35,36.6) PSM(134.35,40.3) PSM(135.35,16.8) PSM(135.35,34.8) PSM(135.35,38.4) PSM(136.35,15) PSM(136.35,18.6) PSM(136.35,33) PSM(136.35,36.6) PSM(136.35,40.3) PSM(137.35,13.2) PSM(137.35,16.8) PSM(137.35,34.8) PSM(137.35,38.4) PSM(138.35,15) PSM(138.35,18.6) PSM(138.35,33) PSM(138.35,36.6) PSM(138.35,40.3) PSM(139.35,16.8) PSM(139.35,13.2) PSM(139.35,34.8) PSM(139.35,38.4) PSM(140.35,18.6) PSM(140.35,15) PSM(140.35,33) PSM(140.35,36.6) PSM(140.35,40.3) PSM(141.35,16.8) PSM(141.35,34.8) PSM(141.35,38.4) PSM(141.35,13.2) PSM(142.35,15) PSM(142.35,18.6) PSM(142.35,33) PSM(142.35,36.6) PSM(142.35,40.3) PSM(143.35,13.2) PSM(143.35,16.8) PSM(143.35,34.8) PSM(143.35,38.4) PSM(144.35,15) PSM(144.35,18.6) PSM(144.35,33) PSM(144.35,36.6) PSM(144.35,40.3) PSM(145.35,13.2) PSM(145.35,20.4) PSM(145.35,31.2) PSM(145.35,16.8) PSM(145.35,34.8) PSM(145.35,38.4) PSM(146.35,33) PSM(146.35,36.6) PSM(146.35,40.3) PSM(146.35,18.6) PSM(147.35,16.8) PSM(147.35,20.4) PSM(147.35,34.8) PSM(147.35,38.4) PSM(148.35,36.6) PSM(148.35,40.3) PSM(148.35,18.6) PSM(149.35,16.8) PSM(149.35,34.8) PSM(149.35,38.4) PSM(149.35,16.8) PSM(149.35,20.4) PSM(150.35,36.6) PSM(150.35,40.3) PSM(150.35,18.6) PSM(151.35,38.4) PSM(151.35,16.8) PSM(152.35,15) PSM(158.75,32)
  rect 1.7x1.7 on Mech2: PSM(29.21,58.42) PSM(133.35,58.42)
  round 20.5 on Mech2: PSM(30.48,73.66) PSM(134.62,73.66)
  round 1.7 on Mech2: PSM(31.75,58.42) PSM(135.89,58.42)

## Via types
v1: diameter 0.6, hole 0.3, Top Layer to Bottom Layer, tented both sides, 433 vias
v2: diameter 1.6, hole 1, Top Layer to Bottom Layer, 191 vias
v3: diameter 0.9, hole 0.5, Top Layer to Bottom Layer, tented both sides, 105 vias
v4: diameter 1.27, hole 0.7, Top Layer to Bottom Layer, tented both sides, 2 vias

## Nets (pads, with @x,y where several pads share a name; then routed paths per layer and width w, separated by ;. In a path a pad name is that pad's centre, name@x,y a point inside that pad or via, vN(x,y) a via of type N, cw(c..) or ccw(c..) an arc to the next point about the centre after c; other vN are vias at no path point)
5VFILT: C3.1 R6.1 R7.1 U2.8 | length 31
  Top Layer w0.6: R6.1@4.35,39.45 4.35,38.2 3.75,37.6 2.15,37.6 1.35,36.8 1.35,27.8 2.35,26.8 9.15,26.8 9.55,26.4 C3.1@9.55,25 ; R7.1@5.75,24.95 9.5,24.95 C3.1@9.55,25 ; C3.1@9.55,24.8 C3.1@9.55,25 ; U2.8@12.55,25 C3.1@9.55,25
+5V: C37.1 C39.2 C62C.1 C64C.1 C67C.1 D1C.2 J2.5 J2C.1 J2C.1A J2C.1B J3.5 JP1.2 JP2.2 LED1.1 R6.2 R84.1 R85.1 R86.1 R87.1 TP5C.1 U1.8 U2C.3 U3C.3 | length 573.8
  Top Layer w0.4: C39.2@8.95,46.35 U1.8@8.95,48.6 ; U1.8@9.15,48.695 10.655,48.695 11.15,48.2 11.15,45.6 C37.1@12.35,44.4 ; LED1.1@95.25,101.92 96.8,101.92 97.485,101.235 J2C.1A@102.255,101.235 ; J2C.1@102.2,101.3 102.255,101.3 J2C.1@103.45,101.3 ; J2C.1@103.505,101.235 J2C.1@104.55,101.235 ; 118.25,108.8 118.3,108.75 120.35,106.7 R86.1@120.35,104.55 ; 122.55,113.4 122.555,113.595 125.65,113.4 ; v3(127.15,96.6) R87.1@127.15,98.05 ; 132.65,113.3 132.75,113.2 J2.5@132.75,106.4 ; R84.1@155.75,99.95 155.75,101 155.95,101.2 157.35,101.2 158.95,102.8
  Top Layer w0.6: 1.75,43.8 1.75,43.4 3.35,41.8 R6.2@4.35,41.8 ; R6.2@4.35,41.35 R6.2@4.35,41.8 ; C37.1@12.35,44.4 12.35,44.2 9.95,41.8 R6.2@4.35,41.8
  Top Layer w1: v2@14.75,66.8 15.35,66.2 16.55,65 17.15,65 ; v2@15.7,66.95 16.139,66.901 v2@16.15,66.9 ; 16.15,65.4 16.15,65.5 ; 16.15,65.7 16.15,65.5 ; v2(16.15,67) v2@16.15,66.9 ; 16.55,65.7 16.55,65.8 ; 16.95,65.2 16.15,66 v2@16.15,66.9 ; C62C.1@18.95,65.1 16.55,65.1 16.2,65.45 16.15,65.5
  Top Layer w1.5: U2C.3@12.95,67 v2(14.35,67) v2(16.15,67) 16.15,66.9 16.15,66 16.15,65.7
  Top Layer w2: 1.75,43.4 v2(1.75,67) v2(1.75,68.8) 1.75,100.4 4.95,103.6 6.784,103.6 16.55,113.4 51.75,113.4 52.05,113.1 56.35,113.1 56.65,113.4 103.55,113.4 C67C.1@112.776,104.14 ; J2C.1@104.55,101.235 J2C.1B@104.755,101.235 104.985,101.235 107.89,104.14 C67C.1@112.776,104.14 ; D1C.2@109.75,111.8 109.774,111.739 C67C.1@112.776,104.14 ; D1C.2@109.843,111.76 109.84,111.766 C67C.1@112.776,104.14 ; C67C.1@112.776,104.626 116.15,108 117.55,108 118.3,108.75 118.95,109.4 TP5C.1@118.95,111.8 120.55,113.4 122.55,113.4 125.65,113.4 149.15,113.4 150.35,112.2 150.35,107.6 150.95,107 151.35,106.6 152.05,106.6 153.35,105.3 156.15,105.3 156.65,105.3
  Top Layer w2.5: 149.75,29.3 149.782,29.617 149.85,30.9 150.95,32 153.666,31.953 153.696,31.952 154.07,32 v2(158.75,32) 162.55,32 163.15,32.6 163.15,52 163.15,101.8 161.45,103.5 159.05,103.5 157.75,104.8 156.95,104.8 156.775,104.975 156.551,105.096
  MidLayer2 w1.5: v2(16.15,67) v2(14.35,67) 3.75,67 ; 3.75,67 2.75,68 1.95,68.8 v2(1.75,68.8) v2(1.75,67) 3.75,67
  Bottom Layer w0.4: v3(127.15,96.6) 127.15,100.8 J2.5@132.75,106.4
  Bottom Layer w1.5: JP1.2@74.295,6.35 72.39,6.35 71.755,5.715 71.755,2.395 72.55,1.6 139.69,1.6 139.89,1.8 ; 107.315,1.905 107.315,5.08 108.585,6.35 JP2.2@109.855,6.35
  Bottom Layer w2: 139.89,1.8 147.55,1.8 154.95,9.2 154.95,21.6 157.35,24 157.35,32 ; 156.95,32 157.35,32 ; v2(158.75,32) 157.35,32
AUDIOL: C7.1 C41.1 FPGA1C.R5 | length 48.4
  Top Layer w0.2: v1(77.75,29) FPGA1C.R5@78.25,28.5
  Top Layer w0.4: C41.1@40.767,20.32 40.77,20.323 C7.1@40.77,25.4
  MidLayer1 w0.2: C41.1@40.767,20.32 44.17,20.32 v1(46.15,22.3)
  MidLayer2 w0.14: 75.25,28.5 77.25,28.5
  MidLayer2 w0.2: v1(46.15,22.3) 49.35,22.3 70.05,22.3 72.808,25.058 ; 71.75,24 74.75,27 74.75,28 75.25,28.5 ; 77.25,28.5 v1(77.75,29)